# Altium PCB Copy of corePCB3.PcbDoc (part 1 of 3)
Units mil, origin at the board's own origin, x right, y up, seen from the top; angles counter-clockwise.
Board outline 6000 x 4000 mil, 6 copper layers (Top Layer, Layer 3, Layer 1, Layer 2, Layer 4, Bottom Layer), stack 32.111 mil thick; 90 components, 166 nets, 637 pads, 492 vias.
Unrouted connection lines stored in the file: 227.
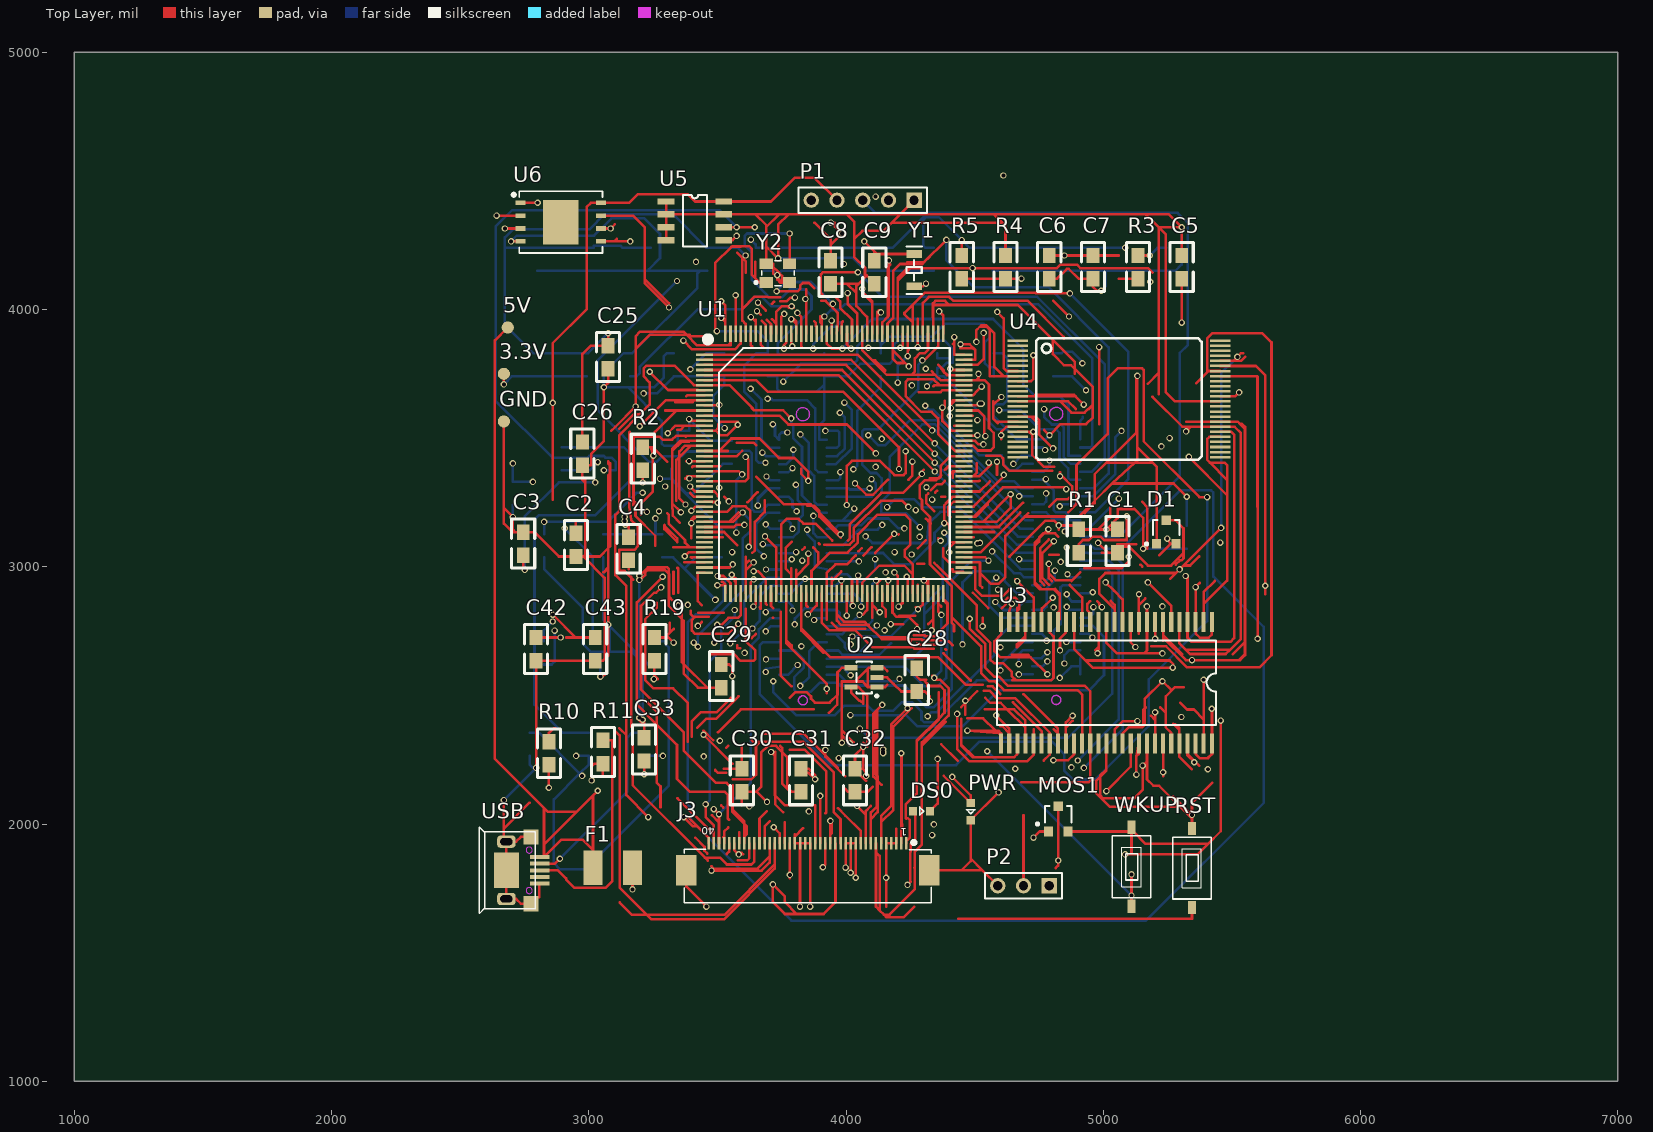
[diagram p0: Top Layer view]
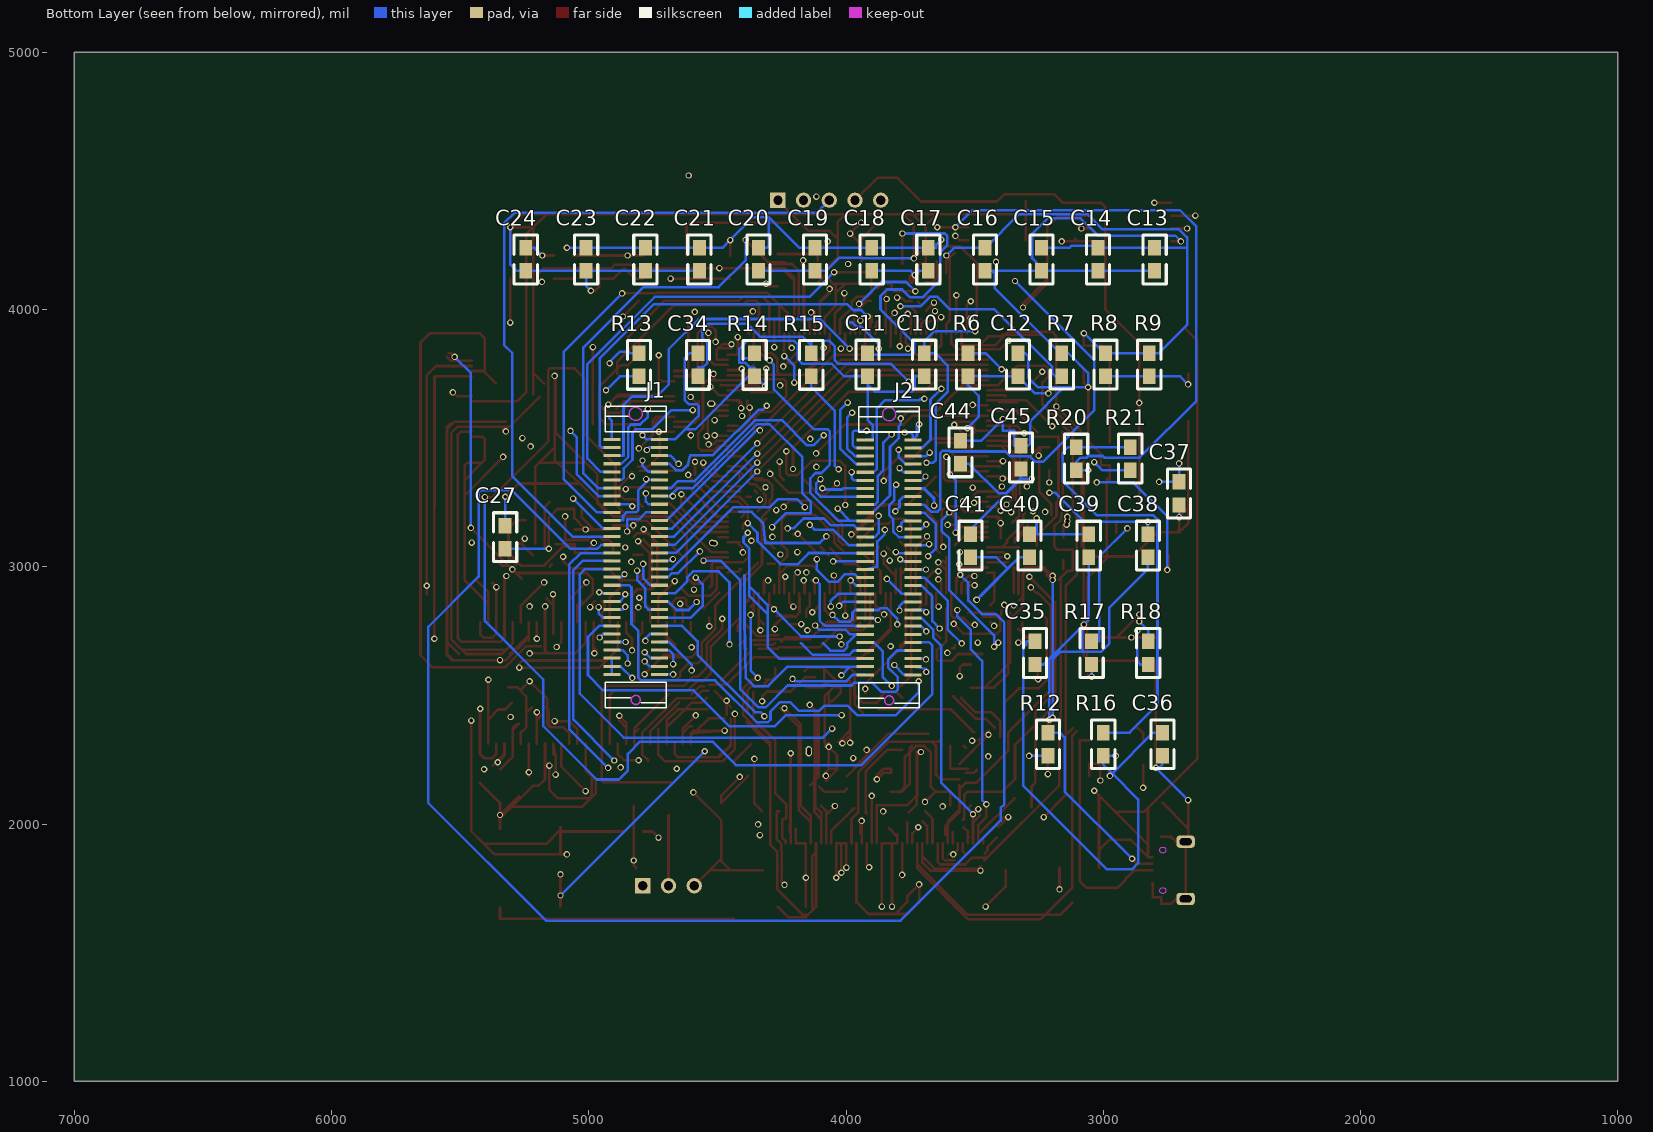
[diagram p1: Bottom Layer view, seen from below]
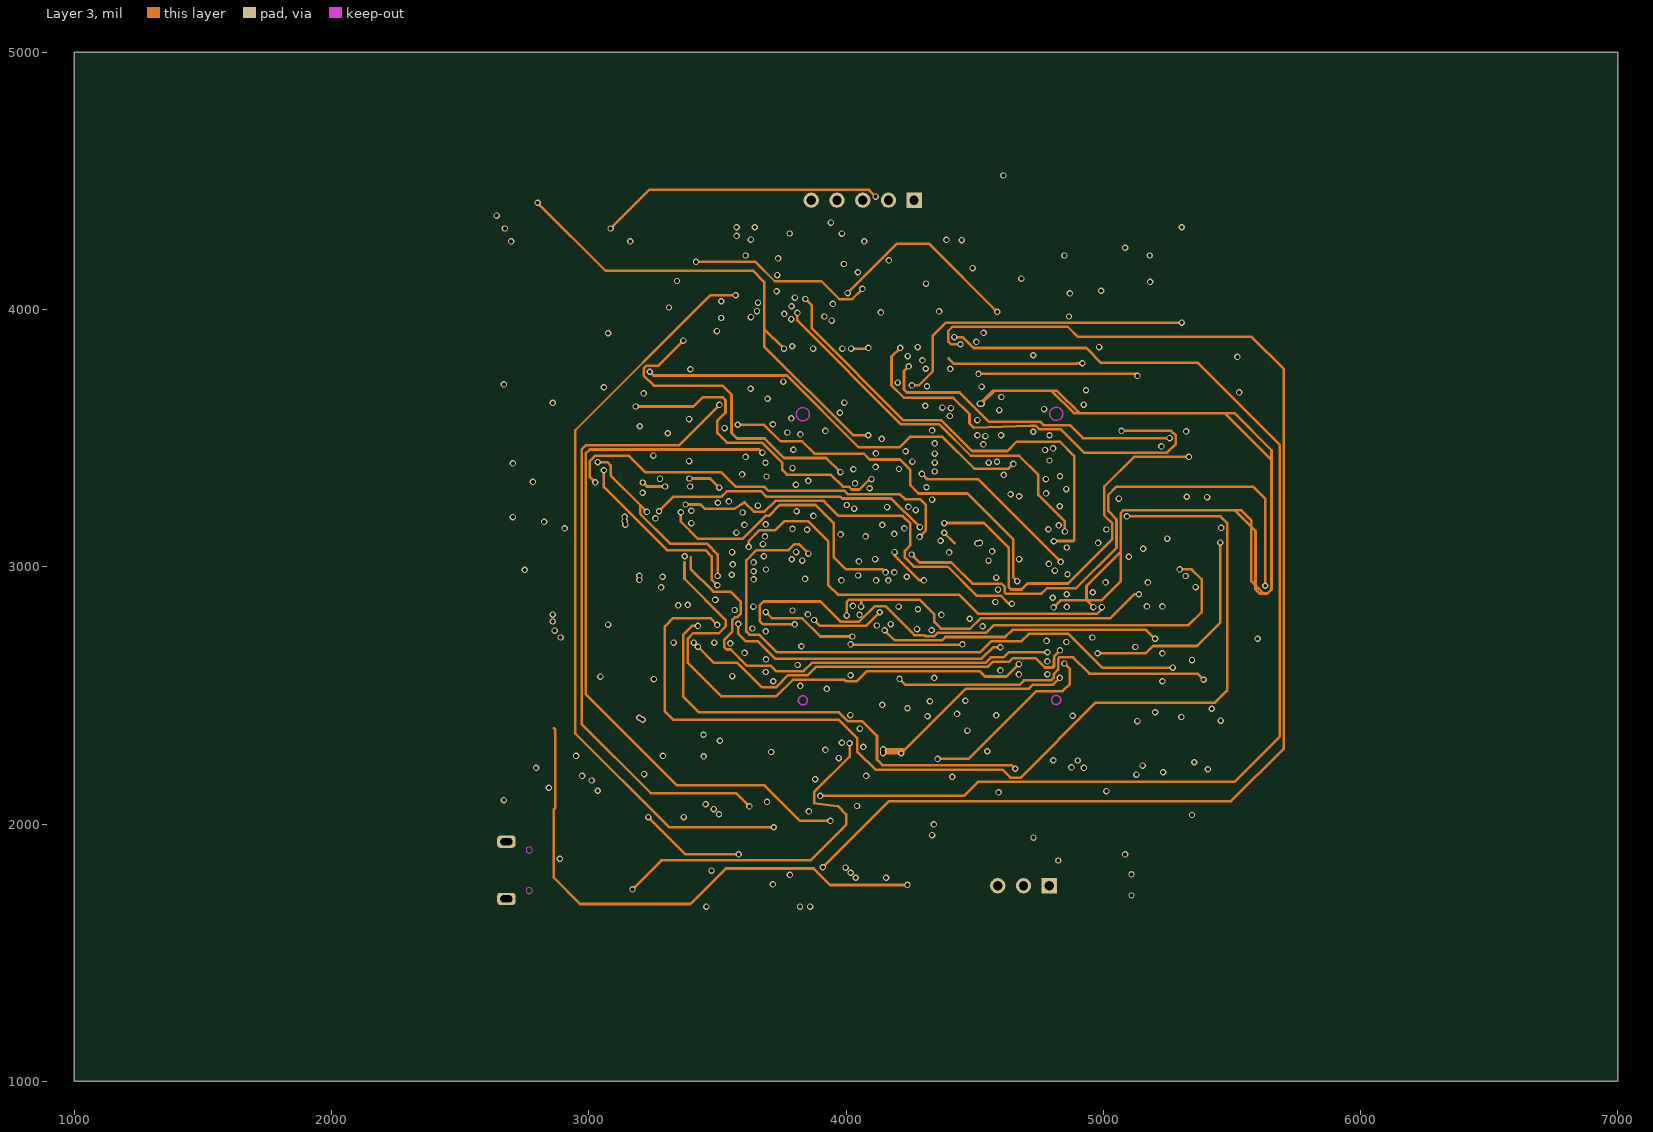
[diagram p2: Layer 3]
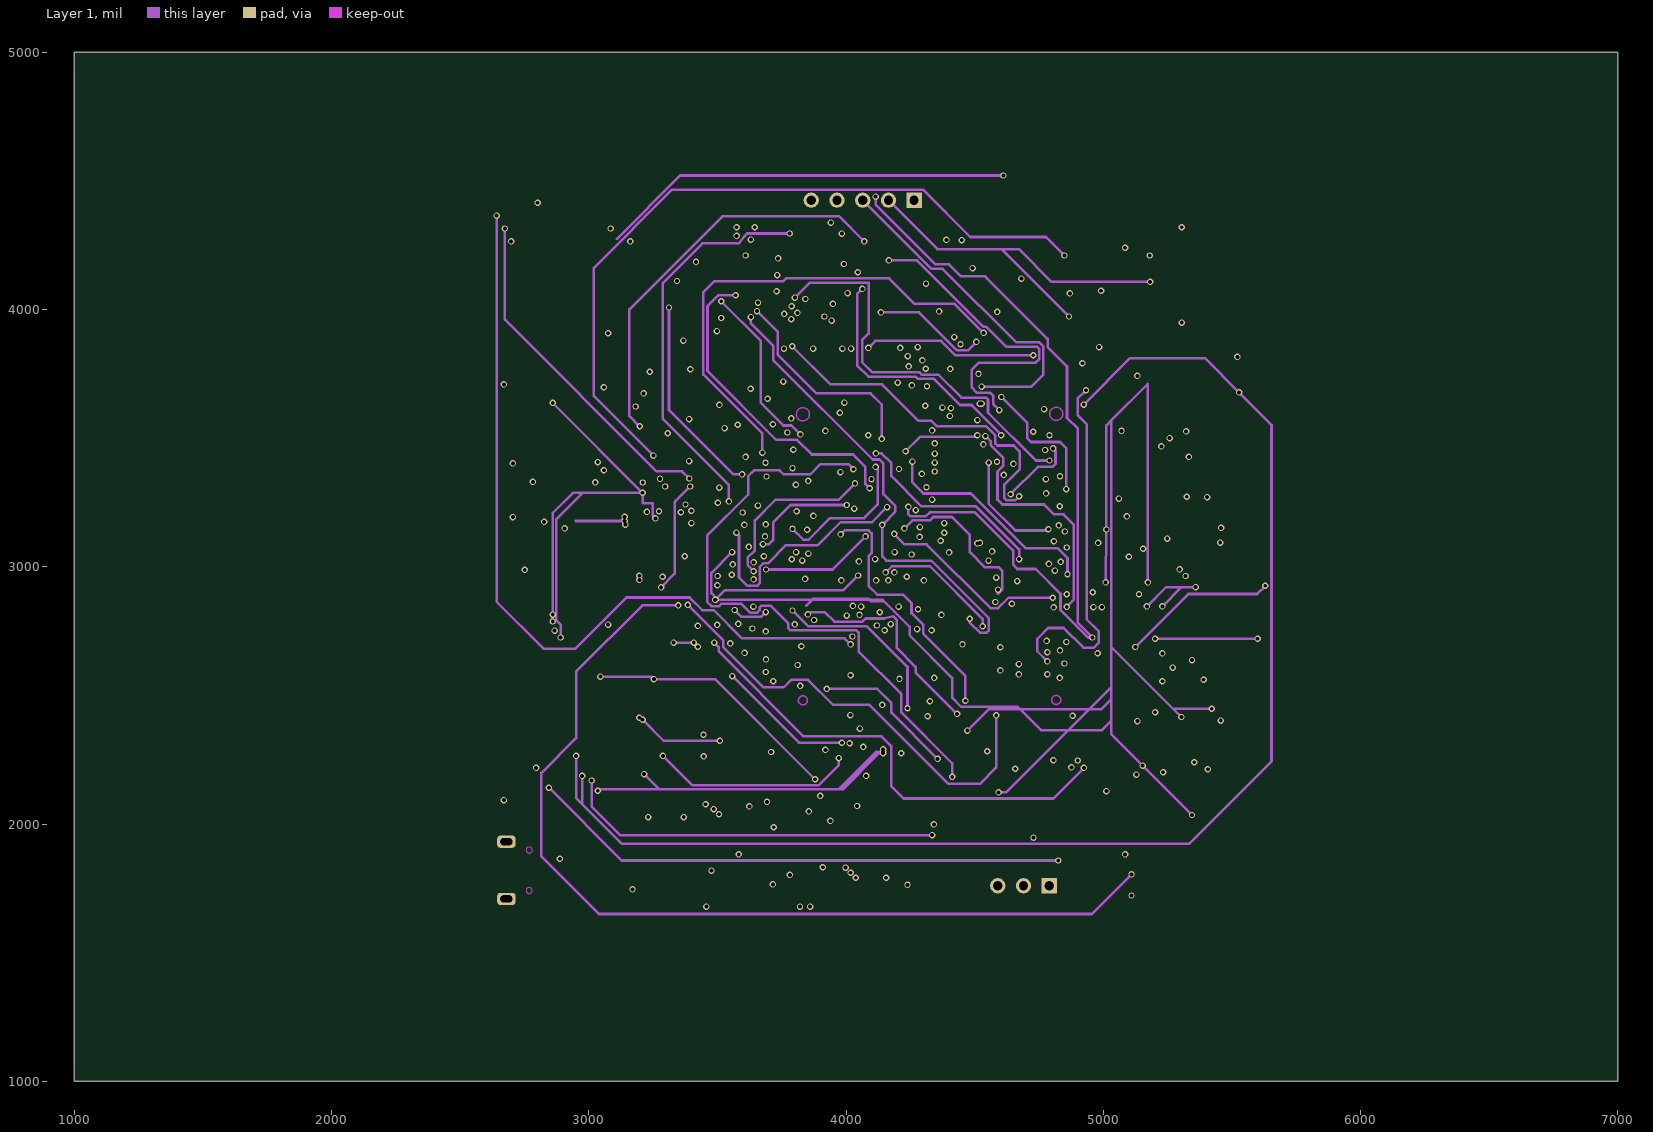
[diagram p3: Layer 1]
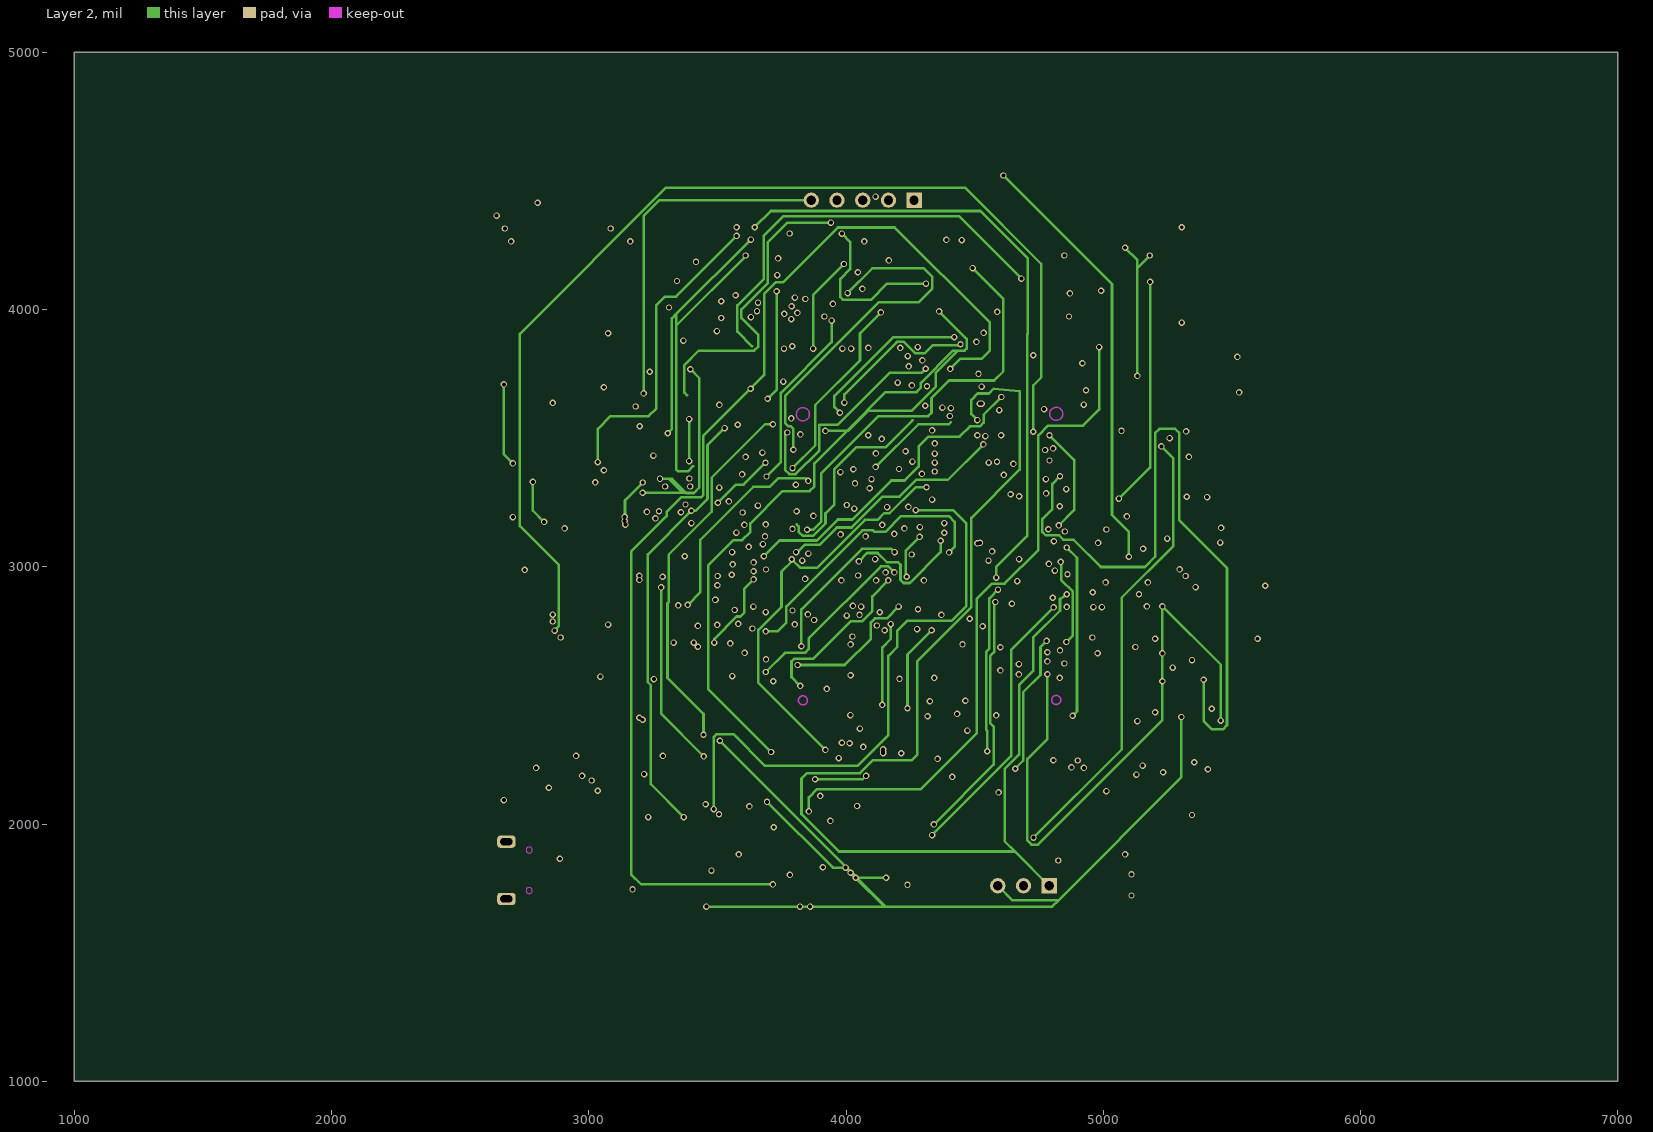
[diagram p4: Layer 2]
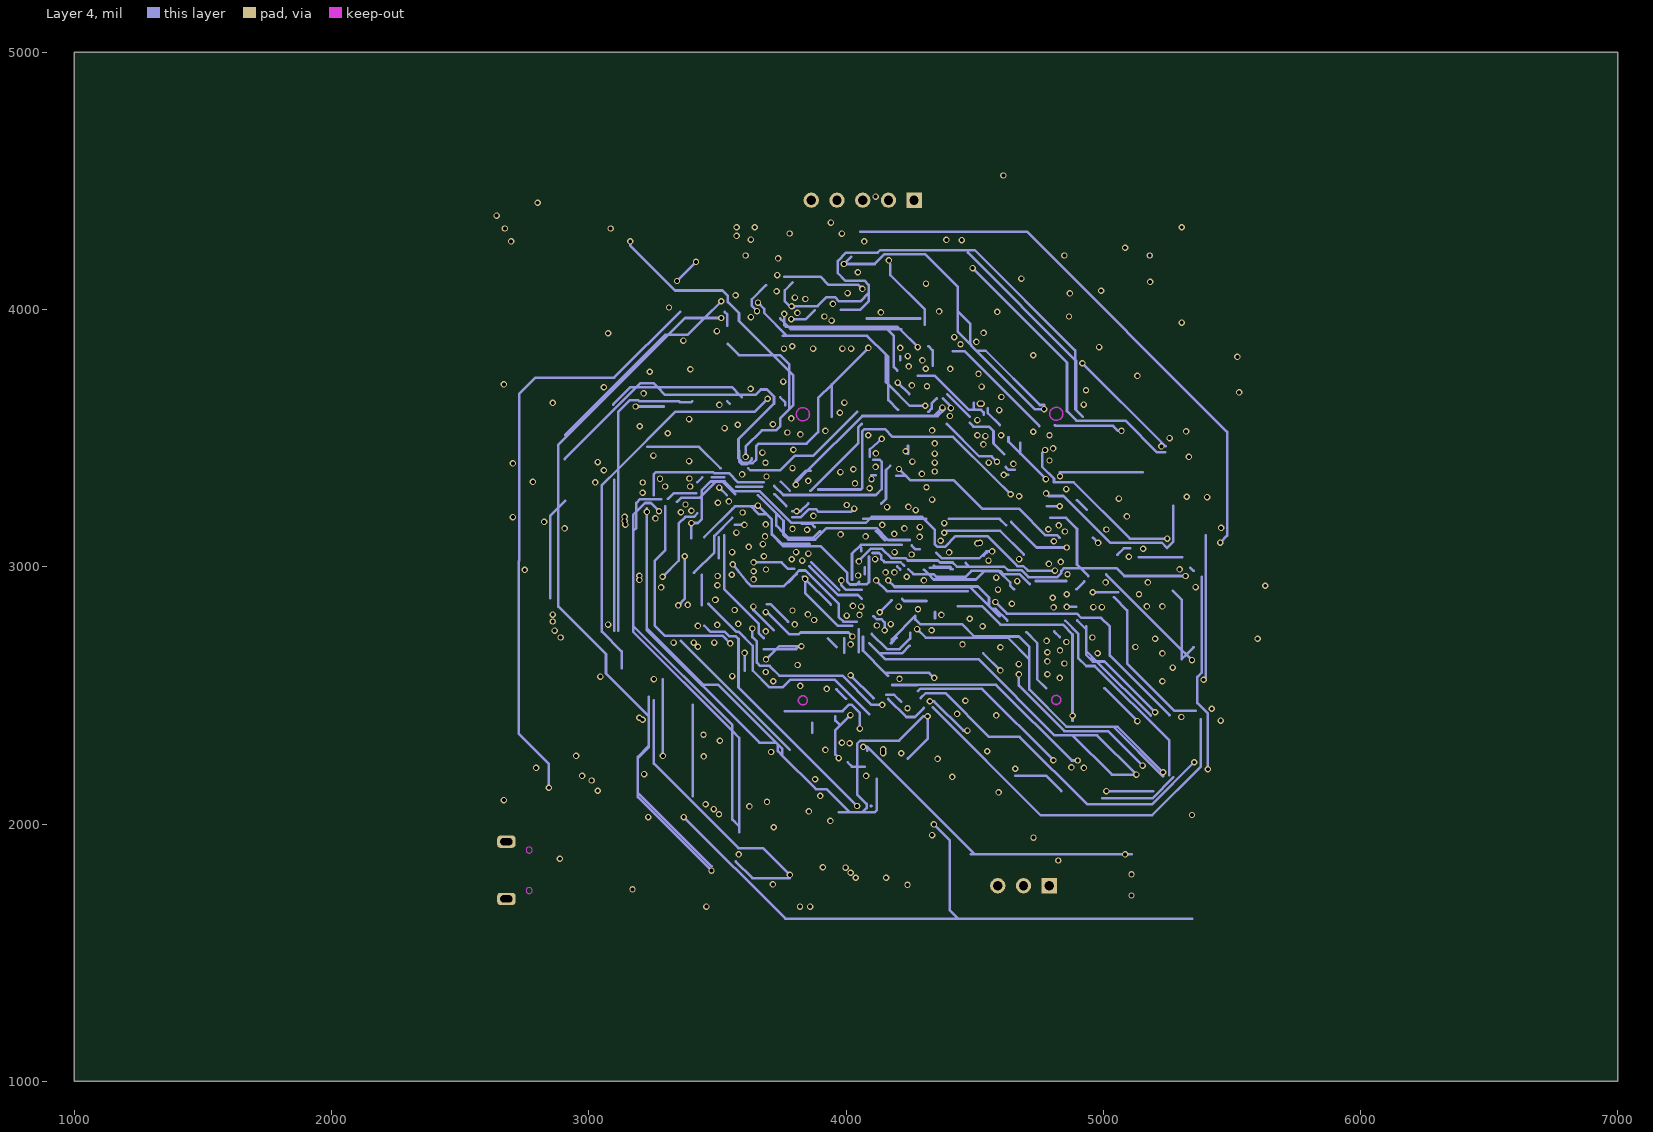
[diagram p5: Layer 4]

## Layer stack, top to bottom
Top Solder: solder mask 0.4, Solder Resist, Dk 3.5
Top Layer: signal copper 1.4
Dielectric 2: prepreg 2.8, PP-006, Dk 4.1
Layer 3: signal copper 1.3779
Dielectric 4: prepreg 2.8, PP-006, Dk 4.1
Layer 1: signal copper 1.3778
Dielectric 1: dielectric 12.6, FR-4, Dk 4.8
Layer 2: signal copper 1.3778
Dielectric 5: prepreg 2.8, PP-006, Dk 4.1
Layer 4: signal copper 1.3779
Dielectric 3: prepreg 2.8, PP-006, Dk 4.1
Bottom Layer: signal copper 1.4
Bottom Solder: solder mask 0.4, Solder Resist, Dk 3.5

## Board outline
1000,1000 7000,1000 7000,5000 1000,5000

## Design rules (kind name [scope] priority, off if disabled: settings)
Clearance [All] p1: gap=6 ignorepadtopadclearanceinfootprint=TRUE except(0: Arc-Hole Track-Hole SMDPad-Hole THPad-Hole Via-Hole Fill-Hole Poly-Hole Region-Hole Text-Hole)
ComponentClearance [All] p1 off: gap=10 collisioncheckmode=3 verticalgap=10 showdistances=FALSE
DiffPairsRouting [All] p1 off: maxlimit=10 minlimit=10 mostfreqgap=10 toplayer_minwidth=15 toplayer_maxwidth=15 toplayer_prefwidth=15 midlayer1_minwidth=15 midlayer1_maxwidth=15 midlayer1_prefwidth=15 midlayer2_minwidth=15 midlayer2_maxwidth=15 midlayer2_prefwidth=15 midlayer3_minwidth=15 midlayer3_maxwidth=15 midlayer3_prefwidth=15 midlayer4_minwidth=15 midlayer4_maxwidth=15 midlayer4_prefwidth=15 bottomlayer_minwidth=15 bottomlayer_maxwidth=15 bottomlayer_prefwidth=15 maxuncoupledlength=500
FanoutControl Fanout_BGA [IsBGA] p1 off: bgadir=Out bgaviamode=Centered fanoutstyle=Auto fanoutdirection=Alternating viagrid=1 // Fanout_BGA (Default Rule)
FanoutControl Fanout_LCC [IsLCC] p2 off: bgadir=Out bgaviamode=Centered fanoutstyle=Auto fanoutdirection=Alternating viagrid=1 // Fanout_LCC (Default Rule)
FanoutControl Fanout_SOIC [IsSOIC] p3 off: bgadir=Out bgaviamode=Centered fanoutstyle=Auto fanoutdirection=Alternating viagrid=1 // Fanout_SOIC (Default Rule)
FanoutControl Fanout_Small [(CompPinCount < 5)] p4 off: bgadir=Out bgaviamode=Centered fanoutstyle=Auto fanoutdirection=OutThenIn viagrid=1 // Fanout_Small (Default Rule)
FanoutControl Fanout_Default [All] p5 off: bgadir=Out bgaviamode=Centered fanoutstyle=Auto fanoutdirection=Alternating viagrid=1 // Fanout_Default (Default Rule)
Height [All] p1 off: minheight=0 maxheight=1000 prefheight=500
PolygonConnect [All] p1: connectstyle=Relief reliefconductorwidth=10 reliefentries=4 polygonreliefangle="90 Angle" airgapwidth=10
RoutingCorners [All] p1 off: cornerstyle=45-Degree minsetback=100 maxsetback=100
RoutingLayers [All] p1 off: top layer_v5=TRUE mid layer 1_v5=TRUE mid layer 2_v5=TRUE mid layer 3_v5=TRUE mid layer 4_v5=TRUE bottom layer_v5=TRUE
RoutingPriority [All] p1 off: routingpriority=0
RoutingTopology [All] p1 off: topology=Shortest
RoutingVias [All] p1: holewidth=15 width=25 viastyle="Through Hole" minholewidth=15 minwidth=25 maxholewidth=15 maxwidth=25
SMDToCorner [All] p1: distance=0
SolderMaskExpansion [All] p1: expansion=4
Width [All] p1 off: maxlimit=10 minlimit=10 preferedwidth=10
18 further rules are at their usual default settings.

## Classes and differential pairs
component class stm: C1 C2 C3 C4 C5 C6 C7 C8 C9 C10 C11 C12 C13 C14 C15 C16 C17 C18 C19 C20 C21 C22 C23 C24 C25 C26 C27 D1 J1 J2 P1 R1 R2 R3 R4 R5 R6 R7 R8 R9 RST U1 Y1 Y2
component class mem: C35 C36 C37 C38 C39 C40 C41 C42 C43 C44 C45 R16 R17 R18 R19 R20 R21 U3 U4 U5 U6
component class circuit: 3.3V 5V C28 C29 C30 C31 C32 C33 C34 DS0 F1 GND J3 MOS1 P2 PWR R10 R11 R12 R13 R14 R15 U2 USB WKUP

## Components (designator, comment, footprint, x,y, rotation, side; value= is the part's Value field where it differs from the comment)
3.3V "TEST POINT" TP-1.5 2670,3750 r90 top
5V "TEST POINT" TP-1.5 2685,3930 r0 top
C1 "104" 0805 5055,3055 r90 top
C2 "104" 0805 2950,3040 r90 top
C3 "225" 0805 2745,3045 r90 top
C4 "225" 0805 3155,3025 r90 top
C5 "225" 0805 5305,4120 r90 top
C6 "10uF" 0805 4790,4120 r90 top
C7 "104" 0805 4960,4120 r90 top
C8 "6pF" 0805 3940,4100 r90 top
C9 "6pF" 0805 4110,4100 r90 top
C10 "22pF" 0805 3696.13,3740.59 r90 bottom
C11 "22pF" 0805 3916.13,3740.59 r90 bottom
C12 "104" 0805 3331.13,3740.59 r90 bottom
C13 "104" 0805 2800.13,4150 r90 bottom
C14 "104" 0805 3020.13,4150 r90 bottom
C15 "104" 0805 3240.13,4150 r90 bottom
C16 "104" 0805 3460.13,4150 r90 bottom
C17 "104" 0805 3680.13,4150 r90 bottom
C18 "104" 0805 3900.13,4150 r90 bottom
C19 "104" 0805 4120.13,4150 r90 bottom
C20 "104" 0805 4340.13,4150 r90 bottom
C21 "104" 0805 4570.13,4150 r90 bottom
C22 "104" 0805 4780.13,4150 r90 bottom
C23 "104" 0805 5010.13,4150 r90 bottom
C24 "104" 0805 5245.13,4150 r90 bottom
C25 "104" 0805 3074.94,3770 r90 top
C26 "104" 0805 2975,3395 r90 top
C27 "104" 0805 5325,3070 r90 bottom
C28 "104" 0805 4274.94,2515 r90 top
C29 "10uF" 0805 3514.94,2530 r90 top
C30 "103" 0805 3595,2125 r90 top
C31 "104" 0805 3825,2125 r90 top
C32 "10uF" 0805 4035,2125 r90 top
C33 "104" 0805 3214.94,2245 r90 top
C34 "104" 0805 4575.13,3740 r90 bottom
C35 "104" 0805 3265.13,2620 r90 bottom
C36 "104" 0805 2770.13,2265 r90 bottom
C37 "104" 0805 2705.06,3240 r90 bottom
C38 "104" 0805 2826.45,3036.93 r90 bottom
C39 "104" 0805 3056.45,3036.93 r90 bottom
C40 "104" 0805 3286.45,3036.93 r90 bottom
C41 "104" 0805 3516.45,3036.93 r90 bottom
C42 "104" 0805 2795,2635 r90 top
C43 "104" 0805 3025,2635 r90 top
C44 "104" 0805 3555.13,3400 r90 bottom
C45 "104" 0805 3320.13,3380 r90 bottom
D1 "BAT54C" SOT-23 5245,3130 r0 top
DS0 "LED" SMDLED-0603 4260,2050 r0 top
F1 "1812L075PR" *1812 3093.23,1830 r0 top
GND "TEST POINT" TP-1.5 2670,3565 r90 top
J1 "3710M060046G3FT01" 3710F060046G3FT01 4910,2581.61 r0 bottom
J2 "3710M060046G3FT01" 3710F060046G3FT01 3925.04,2580.04 r0 bottom
J3 "RGBLCD" FPC-TOP40 4234.65,1929 r180 top
MOS1 "SI2301" SO-G3/C2.5 4825,2020 r0 top
P1 "SWD" HDR1X5 4265,4425 r180 top
P2 "USART1" HDR1X3 4790,1760 r180 top
PWR "LED" SMDLED-0603 4485,2081.93 r270 top
R1 "10K" 0805 4905,3055 r90 top
R2 "10R" 0805 3209.94,3375 r90 top
R3 "10R" 0805 5135,4120 r90 top
R4 "0R" 0805 4620,4120 r90 top
R5 "0R" 0805 4450,4120 r90 top
R6 "10K" 0805 3526.13,3740.59 r90 bottom
R7 "100K" 0805 3161.13,3740.59 r90 bottom
R8 "0R" 0805 2991.13,3740.59 r90 bottom
R9 "0R" 0805 2821.13,3740.59 r90 bottom
R10 "1K" 0805 2844.94,2230 r90 top
R11 "10R" 0805 3055,2235 r90 top
R12 "10R" 0805 3215.06,2265 r90 bottom
R13 "10R" 0805 4805.13,3740 r90 bottom
R14 "100K" 0805 4355.13,3740 r90 bottom
R15 "1K" 0805 4135.13,3740 r90 bottom
R16 "0R" 0805 3000.13,2265 r90 bottom
R17 "10K" 0805 3045.13,2620 r90 bottom
R18 "10K" 0805 2825.13,2620 r90 bottom
R19 "10K" 0805 3255,2635 r90 top
R20 "4.7K" 0805 3105.13,3375 r90 bottom
R21 "4.7K" 0805 2895.13,3375 r90 bottom
RST "KEY_M" KEY_SOP3625 5345,1675 r90 top
U1 "STM32F767IGT6" LQFP176 3450,3824.02 r0 top
U2 "CAT6219-330TD" SOT-23-5 4120,2532.6 r180 top
U3 "W9825G6KH" TSOP54 5421.97,2785 r270 top
U4 "MT29F4G08" TSOP48 4667.6,3879.01 r0 top
U5 "24C02" SOP-8 3300.59,4420 r0 top
U6 "W25Q256" WSON8 2891.5,4340 r0 top
USB "USB-AB" "USB_AB - 5S - B" 2595,1820 r90 top
WKUP "KEY_UP" KEY_SOP3625 5110,1680 r90 top
Y1 "32.768KHz" XTAL3215 4265,4090 r90 top
Y2 "25Mhz" XTAL3225 3690,4105 r0 top

## Footprints (in the part's own frame and the unit in brackets; to place one, negate y for a bottom-side part, rotate by r counter-clockwise, add the part's x,y. Pads: shape width x height; smd on the part's side, far side on the other; paste and mask are expansions set on the pad)
0805 [mil]
  rect 60x50 smd: 1(0,-0.06) 2(90,-0.06)
  silkscreen extent -50,-45 140,45
3710F060046G3FT01 [mm]
  rect 1.7x0.3 smd: 1(-4.7,0) 2(-4.7,-0.8) 3(-4.7,-1.6) 4(-4.7,-2.4) 5(-4.7,-3.2) 6(-4.7,-4) 7(-4.7,-4.8) 8(-4.7,-5.6) 9(-4.7,-6.4) 10(-4.7,-7.2) 11(-4.7,-8) 12(-4.7,-8.8) 13(-4.7,-9.6) 14(-4.7,-10.4) 15(-4.7,-11.2) 16(-4.7,-12) 17(-4.7,-12.8) 18(-4.7,-13.6) 19(-4.7,-14.4) 20(-4.7,-15.2) 21(-4.7,-16) 22(-4.7,-16.8) 23(-4.7,-17.6) 24(-4.7,-18.4) 25(-4.7,-19.2) 26(-4.7,-20) 27(-4.7,-20.8) 28(-4.7,-21.6) 29(-4.7,-22.4) 30(-4.7,-23.2) 31(0,-23.2) 32(0,-22.4) 33(0,-21.6) 34(0,-20.8) 35(0,-20) 36(0,-19.2) 37(0,-18.4) 38(0,-17.6) 39(0,-16.8) 40(0,-16) 41(0,-15.2) 42(0,-14.4) 43(0,-13.6) 44(0,-12.8) 45(0,-12) 46(0,-11.2) 47(0,-10.4) 48(0,-9.6) 49(0,-8.8) 50(0,-8) 51(0,-7.2) 52(0,-6.4) 53(0,-5.6) 54(0,-4.8) 55(0,-4) 56(0,-3.2) 57(0,-2.4) 58(0,-1.6) 59(0,-0.8) 60(0,0)
  Keep-Out Layer circle w0.152: c-2.35,-25.725 r0.65
  Keep-Out Layer circle w0.152: c-2.35,2.525 r0.45
  silkscreen extent -5.35,-26.48 0.65,3.27
*1812 [mm]
  rect 1.9x3.4 smd: 1(-1.95,0) 2(1.95,0)
FPC-TOP40 [mm]
  rect 0.25x1.2 smd: 1(0,0.102) 2(0.5,0.102) 3(1,0.102) 4(1.5,0.102) 5(2,0.102) 6(2.5,0.102) 7(3,0.102) 8(3.5,0.102) 9(4,0.102) 10(4.5,0.102) 11(5,0.102) 12(5.5,0.102) 13(6,0.102) 14(6.5,0.102) 15(7,0.102) 16(7.5,0.102) 17(8,0.102) 18(8.5,0.102) 19(9,0.102) 20(9.5,0.102) 21(10,0.102) 22(10.5,0.102) 23(11,0.102) 24(11.5,0.102) 25(12,0.102) 26(12.5,0.102) 27(13,0.102) 28(13.5,0.102) 29(14,0.102) 30(14.5,0.102) 31(15,0.102) 32(15.5,0.102) 33(16,0.102) 34(16.5,0.102) 35(17,0.102) 36(17.5,0.102) 37(18,0.102) 38(18.5,0.102) 39(19,0.102) 40(19.5,0.102)
  rect 2x3 smd: A(-2.25,2.754) B(21.725,2.754)
  silkscreen extent -2.45,-0.15 21.92,5.97
HDR1X3 [mm]
  rect 1.5x1.5 hole 0.9: 1(0,0)
  round 1.5 hole 0.9: 2(2.54,0) 3(5.08,0)
  silkscreen extent -1.27,-1.27 6.35,1.27
HDR1X5 [mm]
  rect 1.5x1.5 hole 0.9: 1(0,0)
  round 1.5 hole 0.9: 2(2.54,0) 3(5.08,0) 4(7.62,0) 5(10.16,0)
  silkscreen extent -1.27,-1.27 11.43,1.27
KEY_SOP3625 [mm]
  rect 1.3x0.8 smd: 1(0,0) 2(7.8,0)
  silkscreen extent 0.85,-1.9 6.95,1.9
LQFP176 [mm]
  rect 1.65x0.254 smd: 1(0,0) 2(0,-0.5) 3(0,-1) 4(0,-1.5) 5(0,-2) 6(0,-2.5) 7(0,-3) 8(0,-3.5) 9(0,-4) 10(0,-4.5) 11(0,-5) 12(0,-5.5) 13(0,-6) 14(0,-6.5) 15(0,-7) 16(0,-7.5) 17(0,-8) 18(0,-8.5) 19(0,-9) 20(0,-9.5) 21(0,-10) 22(0,-10.5) 23(0,-11) 24(0,-11.5) 25(0,-12) 26(0,-12.5) 27(0,-13) 28(0,-13.5) 29(0,-14) 30(0,-14.5) 31(0,-15) 32(0,-15.5) 33(0,-16) 34(0,-16.5) 35(0,-17) 36(0,-17.5) 37(0,-18) 38(0,-18.5) 39(0,-19) 40(0,-19.5) 41(0,-20) 42(0,-20.5) 43(0,-21) 44(0,-21.5) 89(25.631,-21.5) 90(25.631,-21) 91(25.631,-20.5) 92(25.631,-20) 93(25.631,-19.5) 94(25.631,-19) 95(25.631,-18.5) 96(25.631,-18) 97(25.631,-17.5) 98(25.631,-17) 99(25.631,-16.5) 100(25.631,-16) 101(25.631,-15.5) 102(25.631,-15) 103(25.631,-14.5) 104(25.631,-14) 105(25.631,-13.5) 106(25.631,-13) 107(25.631,-12.5) 108(25.631,-12) 109(25.631,-11.5) 110(25.631,-11) 111(25.631,-10.5) 112(25.631,-10) 113(25.631,-9.5) 114(25.631,-9) 115(25.631,-8.5) 116(25.631,-8) 117(25.631,-7.5) 118(25.631,-7) 119(25.631,-6.5) 120(25.631,-6) 121(25.631,-5.5) 122(25.631,-5) 123(25.631,-4.5) 124(25.631,-4) 125(25.631,-3.5) 126(25.631,-3) 127(25.631,-2.5) 128(25.631,-2) 129(25.631,-1.5) 130(25.631,-1) 131(25.631,-0.5) 132(25.631,0)
  rect 0.254x1.65 smd: 45(2.065,-23.566) 46(2.566,-23.566) 47(3.066,-23.566) 48(3.565,-23.566) 49(4.066,-23.566) 50(4.565,-23.566) 51(5.066,-23.566) 52(5.565,-23.566) 53(6.066,-23.566) 54(6.565,-23.566) 55(7.066,-23.566) 56(7.565,-23.566) 57(8.066,-23.566) 58(8.565,-23.566) 59(9.066,-23.566) 60(9.565,-23.566) 61(10.066,-23.566) 62(10.565,-23.566) 63(11.066,-23.566) 64(11.565,-23.566) 65(12.066,-23.566) 66(12.565,-23.566) 67(13.066,-23.566) 68(13.565,-23.566) 69(14.066,-23.566) 70(14.565,-23.566) 71(15.066,-23.566) 72(15.566,-23.566) 73(16.066,-23.566) 74(16.566,-23.566) 75(17.065,-23.566) 76(17.566,-23.566) 77(18.065,-23.566) 78(18.566,-23.566) 79(19.065,-23.566) 80(19.566,-23.566) 81(20.065,-23.566) 82(20.566,-23.566) 83(21.065,-23.566) 84(21.566,-23.566) 85(22.065,-23.566) 86(22.566,-23.566) 87(23.065,-23.566) 88(23.566,-23.566) 133(23.566,2.065) 134(23.065,2.065) 135(22.566,2.065) 136(22.065,2.065) 137(21.566,2.065) 138(21.065,2.065) 139(20.566,2.065) 140(20.065,2.065) 141(19.566,2.065) 142(19.065,2.065) 143(18.566,2.065) 144(18.065,2.065) 145(17.566,2.065) 146(17.065,2.065) 147(16.566,2.065) 148(16.066,2.065) 149(15.566,2.065) 150(15.066,2.065) 151(14.565,2.065) 152(14.066,2.065) 153(13.565,2.065) 154(13.066,2.065) 155(12.565,2.065) 156(12.066,2.065) 157(11.565,2.065) 158(11.066,2.065) 159(10.565,2.065) 160(10.066,2.065) 161(9.565,2.065) 162(9.066,2.065) 163(8.565,2.065) 164(8.066,2.065) 165(7.565,2.065) 166(7.066,2.065) 167(6.565,2.065) 168(6.066,2.065) 169(5.565,2.065) 170(5.066,2.065) 171(4.565,2.065) 172(4.066,2.065) 173(3.565,2.065) 174(3.066,2.065) 175(2.566,2.065) 176(2.065,2.065)
  silkscreen extent 0.04,-22.15 24.22,1.82
SMDLED-0603 [mil]
  rect 32x32 smd: 1(0,0) 2(66.93,0)
  silkscreen extent 26,-17 42,17
SO-G3/C2.5 [mm]
  rect 0.9x0.95 smd: 1(-0.95,-1.25) 2(0.95,-1.25) 3(0,1.25)
  silkscreen extent -2.15,-0.63 1.3,1.25
SOP-8 [mil]
  rect 65x25 smd: 1(0,0) 2(0,-50) 3(0,-100) 4(0,-150) 5(224.41,-150) 6(224.41,-100) 7(224.41,-50) 8(224.41,0)
  silkscreen extent 65,-175 159,25
SOT-23 [mm]
  rect 0.9x0.95 smd: 1(-0.95,-1.048) 2(0.95,-1.048) 3(0,1.302)
  silkscreen extent -2.07,-1.17 1.3,1.3
SOT-23-5 [mil]
  rect 50x20 smd: 1(0,0) 2(0,-37.4) 3(0,-74.8) 4(100,-74.8) 5(100,0)
  silkscreen extent 0,-99 80,35
TP-1.5 [mm]
  round 1.2 smd: 1(0,0)
TSOP48 [mm]
  rect 2x0.25 smd: 1(0,0) 2(0,-0.5) 3(0,-1) 4(0,-1.5) 5(0,-2) 6(0,-2.5) 7(0,-3) 8(0,-3.5) 9(0,-4) 10(0,-4.5) 11(0,-5) 12(0,-5.5) 13(0,-6) 14(0,-6.5) 15(0,-7) 16(0,-7.5) 17(0,-8) 18(0,-8.5) 19(0,-9) 20(0,-9.5) 21(0,-10) 22(0,-10.5) 23(0,-11) 24(0,-11.5) 25(20,-11.5) 26(20,-11) 27(20,-10.5) 28(20,-10) 29(20,-9.5) 30(20,-9) 31(20,-8.5) 32(20,-8) 33(20,-7.5) 34(20,-7) 35(20,-6.5) 36(20,-6) 37(20,-5.5) 38(20,-5) 39(20,-4.5) 40(20,-4) 41(20,-3.5) 42(20,-3) 43(20,-2.5) 44(20,-2) 45(20,-1.5) 46(20,-1) 47(20,-0.5) 48(20,0)
  silkscreen extent 1.83,-11.75 18.17,0.25
TSOP54 [mm]
  rect 2x0.4 smd: 1(0,0) 2(0,-0.8) 3(0,-1.6) 4(0,-2.4) 5(0,-3.2) 6(0,-4) 7(0,-4.8) 8(0,-5.6) 9(0,-6.4) 10(0,-7.2) 11(0,-8) 12(0,-8.8) 13(0,-9.6) 14(0,-10.4) 15(0,-11.2) 16(0,-12) 17(0,-12.8) 18(0,-13.6) 19(0,-14.4) 20(0,-15.2) 21(0,-16) 22(0,-16.8) 23(0,-17.6) 24(0,-18.4) 25(0,-19.2) 26(0,-20) 27(0,-20.8) 28(12,-20.8) 29(12,-20) 30(12,-19.2) 31(12,-18.4) 32(12,-17.6) 33(12,-16.8) 34(12,-16) 35(12,-15.2) 36(12,-14.4) 37(12,-13.6) 38(12,-12.8) 39(12,-12) 40(12,-11.2) 41(12,-10.4) 42(12,-9.6) 43(12,-8.8) 44(12,-8) 45(12,-7.2) 46(12,-6.4) 47(12,-5.6) 48(12,-4.8) 49(12,-4) 50(12,-3.2) 51(12,-2.4) 52(12,-1.6) 53(12,-0.8) 54(12,0)
  silkscreen extent 1.83,-21.2 10.16,0.4
"USB_AB - 5S - B" [mm]
  rect 0.4x1.9 smd: 1(1.3,-5.436) 2(0.65,-5.436) 3(0,-5.436) 4(-0.65,-5.436) 5(-1.3,-5.436)
  rrect50% 1.2x1.8 hole 0.7 slot 1.2 at 90 deg: 6(2.825,-2.15) 7(-2.825,-2.15)
  rect 1.5x1.5 smd: 8(-3.302,-4.572) 9(3.302,-4.572)
  rect 3.5x2.5 smd: 9(0,-2.159)
  Keep-Out Layer circle w0.102: c2,-4.4 r0.3
  Keep-Out Layer circle w0.102: c-2,-4.4 r0.3
  silkscreen extent -4.26,-5 4.26,0.51
WSON8 [mm]
  rect 1x0.45 smd: 1(-3.975,1.905) 2(-3.975,0.635) 3(-3.975,-0.635) 4(-3.975,-1.905) 5(3.975,-1.905) 6(3.975,-0.635) 7(3.975,0.635) 8(3.975,1.905)
  rect 3.5x4.4 smd: 9(0,0)
  silkscreen extent -4.8,-3.05 4.1,3.05
XTAL3215 [mm]
  rect 0.75x1.5 smd: 1(0,0) 2(3.2,0)
  silkscreen extent -0.74,-0.75 3.94,0.75
XTAL3225 [mm]
  rect 1.3x1.05 smd: 1(0,0) 2(2.3,0) 3(2.3,1.85) 4(0,1.85)
  silkscreen extent -1.14,-0.33 2.74,2.17

## Part data
3.3V 5V GND: library part TEST-POINT, "测试点"
C1 C2 C3 C4 C5 C6 C7 C8 C9 C10 C11 C12 C13 C14 C15 C16 C17 C18 C19 C20 C21 C22 C23 C24 C25 C26 C27 C28 C29 C30 C31 C32 C33 C34 C35 C36 C37 C38 C39 C40 C41 C42 C43 C44 C45: library part C
D1: "双肖特基二极管"
F1: "PTC Resettable Fuse 0.75A_hold_ 1.5A_trip_ 13.2VDC 100A 0.8W 0.2s 0.1Ohm SMD Solder Pad 1812 T/R", Package="1812 Littelfuse", Availability=Unavailable, MF="Littelfuse Inc.", MP=1812L075PR, Price=None, SnapEDA_Link=https://www.snapeda.com/parts/1812L075PR/Littelfuse%20Inc./view-part/?ref=snap
J1 J2: library part 3710F, "3710F060046G3FT01"
J3: library part FPC-40, "FPC-40P-0.5mm"
MOS1: library part MOS-P, "IRLML6401/SI2301"
P1: library part "Header 5", "Header, 5-Pin", LatestRevisionDate=17-Jul-2002, LatestRevisionNote="Re-released for DXP Platform.", Publisher="Altium Limited"
P2: library part "Header 3", "Header, 3-Pin", LatestRevisionDate=17-Jul-2002, LatestRevisionNote="Re-released for DXP Platform.", Publisher="Altium Limited"
R1 R2 R3 R4 R5 R6 R7 R8 R9 R10 R11 R12 R13 R14 R15 R16 R17 R18 R19 R20 R21: library part R
U2: "3.3V 500mA LDO"
U3: library part IS42S16160B, "32MB SDRAM"
U4: library part K9F2G08U0C, "256MB NAND FLASH"
U5: library part 24C256, "EEPROM"
U6: library part W25Q128, "W25Q128"
USB: "MicroUSB"
WKUP: library part KEY_M
Y1: library part XTAL, "普通晶振"
Y2: library part XTAL_3225, "3225贴片无源晶振"

## Via types
v1: diameter 25, hole 15, Top Layer to Bottom Layer, 492 vias

## Nets (pads, with @x,y where several pads share a name; then routed paths per layer and width w, separated by ;. In a path a pad name is that pad's centre, name@x,y a point inside that pad or via, vN(x,y) a via of type N, cw(c..) or ccw(c..) an arc to the next point about the centre after c; other vN are vias at no path point)
1WIRE_DQ: J2.4 U1.92 | length 1640.3
  Top Layer w10: U1.92@4459.09,3036.61 4541.39,3036.61 v1(4554,3024)
  Bottom Layer w10: J2.4@3740,2674.53 3801.47,2674.53 3836,2640 3836,2608 3798.5,2570.5 3798.5,2523 3808,2513.5 3862.5,2513.5 3897.5,2548.5 3968.43,2548.5 3978.43,2538.5 4227,2538.5 4312,2453.5 4340.5,2453.5 4410.5,2523.5 4410.5,2946.5 4488,3024 v1(4554,3024)
BOOT0: J1.31 R7.1 U1.166 | length 4082.4
  Top Layer w10: 3711.5,3962.5 3728.17,3945.83 ; 3711.5,4022 3720,4030.5 ; U1.166@3728.17,3905.33 3728.17,3945.83 ; v1@3778.04,4006.96 v1@3797,4006.96 ; v1(3788.52,4013) 3750.43,4013 3728.17,3990.74 3728.17,3945.83
  Layer 4 w10: v1(3788.52,4013) 3889.59,4013 3924.59,4048 3956.5,4048 3972.5,4032 4056,4032 4088,4064 ; 3792,4105 3762,4075 3762,4032 3787.04,4006.96 v1@3797,4006.96 ; 3979,3999 4055,3999 4088,4032 4088,4064 ; 4474,4221 4890.78,3804.22 ; 4920,3584 4894.83,3609.17 ; 4088,4064 4088,4096 4072,4112 3997,4112 3968,4141 3968,4189 4000,4221 4123,4221 4132.5,4230.5 4500.95,4230.5 4890.78,3840.67 4890.78,3804.22 ; 4890.78,3804.22 4894.83,3800.17 4894.83,3609.17 ; 4890.78,3804.22 4890.78,3613.22 4894.83,3609.17
  Bottom Layer w10: R7.1@3161.07,3740.59 3186.59,3740.59 3198,3752 3198,3776 3423,4001 3596.5,4001 3646,4050.5 3671.5,4050.5 3709,4013 v1(3788.52,4013) ; J1.31@4910,3495 4910,3567 4920,3577 4920,3584
DCMI_D0: J2.16 U1.115 | length 1063.5
  Top Layer w10: U1.115@4459.09,3489.37 4501,3489.37 ; 4511,3480 4501.63,3489.37 4501,3489.37 ; v1(4534,3476) 4514.37,3476 4501,3489.37
  Layer 2 w10: v1(3806,3057) 3812,3057 3841.2,3086.2 3898.2,3086.2 3964.58,3152.58 4021.58,3152.58 4142,3273 4208,3273 4272.5,3337.5 4395.5,3337.5 v1(4534,3476)
  Bottom Layer w10: J2.16@3740,3052.48 3766,3052.48 3802,3053 v1(3806,3057)
DCMI_D1: J2.17 U1.116 | length 1383.6
  Top Layer w10: v1(4003,3240) 4003,3392 4023,3412 4132,3412 4188,3356 4224,3356 4232,3364 v1(4232,3449) ; U1.116@4459.09,3509.06 4509.06,3509.06 v1(4511,3511)
  Layer 1 w10: v1(3677,3088) 3701,3088 3717,3104 3717,3172 3785,3240 v1(4003,3240) ; v1(4232,3449) 4288,3505 4505,3505 v1(4511,3511)
  Layer 4 w10: 4241,3439 4241,3471
  Bottom Layer w10: v1(3677,3088) 3681.02,3083.98 J2.17@3740,3083.98
DCMI_D2: J2.18 U1.117 | length 1312.1
  Top Layer w10: v1(4374.5,3618.58) v1@4374.5,3609.4 ; 4384,3646 4384,3618.9 v1@4374.5,3609.4 ; U1.117@4459.09,3528.74 4411.69,3528.74 4374.5,3565.93 v1@4374.5,3609.4
  Layer 4 w10: v1(3805,3319) v1@3805,3327.66 ; 3863.72,3373.5 3850.84,3373.5 ; v1(4374.5,3618.58) 4341.92,3586 ; v1@4384,3614 4356,3586 4341.92,3586 ; v1@3805,3327.66 3850.84,3373.5 ; v1@3805,3327.66 3805,3335 3843.5,3373.5 3850.84,3373.5 ; 3850.84,3373.5 4063.34,3586 4076.22,3586 4341.92,3586
  Bottom Layer w10: J2.18@3740,3115.47 3794.97,3115.47 3815.5,3136 3815.5,3184 3831.5,3200 3831.5,3239.5 3813,3258 3813,3311 v1(3805,3319)
DCMI_D3: J2.19 U1.118 | length 868.1
  Top Layer w10: 4421.57,3548.43 4424,3548.43 U1.118@4459.09,3548.43
  Layer 2 w10: 3808,3165 3816,3157 3816,3136 3832,3120 3871.63,3120 3920.39,3168.76 3920.39,3207.89 3954.5,3242 3954.5,3379.5 4039.5,3464.5 4153.5,3464.5 4258.5,3569.5
  Bottom Layer w10: v1(3688,3165) 3706.03,3146.97 J2.19@3740,3146.97
  other v1: 4404,3586
DCMI_D4: J1.39 U1.140 | length 746.6
  Top Layer w10: v1(4239.98,3818.98) 4239.98,3847.02 ; U1.140@4239.98,3905.33 4239.98,3847.02 ; 4244,3843 4239.98,3847.02
  Layer 4 w10: v1(4201,3716) 4246,3671 ; 4393,3671 4480.52,3583.48 ; 4480.52,3560 4495.52,3545 4556,3545 4573.5,3527.5 4573.5,3479.29 4615.95,3436.85 ; 4780,3235 v1(4831,3235)
  Bottom Layer w10: v1(4201,3716) 4201,3780 v1(4239.98,3818.98) ; v1(4831,3235) 4839.03,3243.03 J1.39@4910,3243.03
DCMI_D5: J1.36 U1.145 | length 2580.2
  Top Layer w10: U1.145@4141.56,3905.33 4141.56,3950.56 4162,3971 ; v1(4167,4191) 4167,4170 ; 4172,4175 4167,4170 ; 4162,3971 4167,3976 4167,4170 ; 4162,3971 4162,4165 4167,4170
  Layer 1 w10: v1(4167,4191) 4276,4191 4534.5,3932.5 4546,3932.5 4623.5,3855 4742.5,3855 4751.5,3846 4751.5,3808 4737,3793.5 4516.5,3793.5 4489,3766 4489,3696 4508,3677 4560,3677 4572,3665 4572,3633 v1(4596,3609)
  Layer 4 w10: 4172,4175 4172,4134.36 4306.67,3999.69 4306.67,3941.33
  Bottom Layer w10: v1(4596,3609) 4678,3609 4752,3535 4816,3535 4830,3521 4830,3416 4864,3382 4864,3345.52 4872,3337.52 J1.36@4910,3337.52
DCMI_D6: J1.26 U1.167 | length 1765.6
  Top Layer w10: 3692.09,3959.28 3708.48,3942.89 U1.167@3708.48,3905.33 ; 3744,4031.5 3769.5,4031.5 3784.5,4046.5 v1(3801.5,4046.5)
  Layer 1 w10: v1(3801.5,4046.5) 3858.5,4103.5 4087.5,4103.5 4088,4103 4088,3906 4063,3881 4063,3795 4102.5,3755.5 4286.5,3755.5 4295.5,3746.5 4359.48,3746.5 4448.47,3657.51 4543.99,3657.51 4552.15,3649.35 4552.15,3598.73 4737.88,3413 v1(4791,3413)
  Bottom Layer w10: J1.26@4724.96,3369.02 4768,3369.02 4791,3392.02 v1(4791,3413)
DCMI_D7: J1.27 U1.168 | length 1783.4
  Top Layer w10: v1(3658,4027) 3688.8,3996.2 ; 3673,3955.74 3688.8,3939.94 U1.168@3688.8,3905.33
  Layer 4 w10: v1(3658,4027) 3682.17,4002.83 3682.17,3986.83 3771,3898 ; 3755,3898 3771,3898 ; 4203,3610 4165,3648 4165,3708.5 ; v1(4308,3626) 4247.5,3626 4165,3708.5 ; 3771,3898 4082,3898 4155.5,3824.5 ; 4155.5,3824.5 4165,3815 4165,3708.5 ; 4155.5,3824.5 4155.5,3718 4165,3708.5
  Bottom Layer w10: v1(4308,3626) 4324,3610 4340,3610 4516.28,3433.72 4606.07,3433.72 4615.8,3395.7 4636,3375.5 4660.99,3375.5 4686,3400.51 J1.27@4724.96,3400.51
DCMI_HREF: J2.3 U1.85 | length 1200.6
  Top Layer w10: v1(4302.72,2947.3) 4318.72,2931.3 ; U1.85@4318.72,2896.24 4318.72,2931.3 ; 4318.72,2947 4318.72,2931.3
  Layer 2 w10: v1(3826.59,2691) 3826.59,2834.59 4061.5,3069.5 4176.5,3069.5 v1(4189,3057)
  Layer 3 w10: v1(4189,3057) 4189,3043.28 4284.98,2947.3 v1(4302.72,2947.3)
  Layer 4 w10: 3681,2680 3729,2680 ; v1(3689,2640) 3729,2680 ; v1(3826.59,2691) v1@3817,2691 ; 3729,2680 3806,2680 v1@3817,2691 ; 3729,2680 3740,2691 v1@3817,2691
  Bottom Layer w10: v1(3689,2640) 3692.03,2643.03 J2.3@3740,2643.03
DCMI_PLCK: J1.47 U1.52 | length 2178.5
  Top Layer w10: 3664,2841.89 3669.11,2847 ; 3667.5,2836.76 3669.11,2838.37 3669.11,2847 ; U1.52@3669.11,2896.24 3669.11,2847 ; 3716,2802.5 3717,2801.5
  Layer 4 w10: 3606,2595 v1(3606,2665) ; 3762,2439 3987,2439 4012,2464 4022,2464 4054,2432 v1(4054,2371)
  Bottom Layer w10: v1(4054,2371) 4089,2336 4864,2336 5035,2507 5035,2970 5013.94,2991.06 J1.47@4910,2991.06
DCMI_RESET: J1.25 J1.41 U1.138 U1.165 | length 2391.5
  Top Layer w10: U1.165@3747.85,3905.33 3747.85,3961.15 3747.85,3970.85 v1(3760,3983) ; v1(4279,3854) 4279.35,3854.35 U1.138@4279.35,3905.33 4279.35,3963.65
  Layer 4 w10: 3744,3965 3760,3949 ; v1(3760,3983) 3760,3949 ; 4199.41,3762.59 4186,3776 4186,3897 4159,3924 ; 4215,3924 4209,3924 ; v1(4279,3854) 4209,3924 ; 4280,3742 4345.45,3742 4477.7,3609.75 4525.25,3609.75 4535,3600 4535,3590.64 ; 4496,3637 4496,3618 4504,3610 ; 4631.64,3504 4631.64,3486.36 4678,3440 ; 4678,3481 4678,3440 ; v1(4777,3341) 4678,3440 ; 3760,3949 3776,3933 ; 3760,3949 3760,3939 3766,3933 3776,3933 ; 3776,3933 4200,3933 4209,3924 ; 3776,3933 3785,3924 4159,3924 ; 4159,3924 4209,3924
  Bottom Layer w10: J1.25@4724.96,3337.52 v1@4768,3337.52 ; v1(4777,3341) 4773.52,3337.52 v1@4768,3337.52 ; J1.41@4910,3180.04 4867,3180.04 4867,3197.98 4853.48,3211.5 4816,3211.5 4807.5,3220 4807.5,3298.02 v1@4768,3337.52
DCMI_SCL: J1.22 U1.162 | length 1689.1
  Top Layer w10: v1(3787,3963) 3787.91,3963 3806.91,3944 ; v1@3792,3969 3806.91,3954.09 3806.91,3944 ; U1.162@3806.91,3905.33 3806.91,3944
  Layer 4 w10: v1(3787,3963) 3844,3963 3878,3997 ; 4080,3965 4288,3965 ; 4416,3837 4462,3837 4752,3547 ; v1(4778,3285) 4788,3275 4845.09,3275 5026.59,3093.5 5227.5,3093.5 5248,3073 5273,3098 5273,3238
  Bottom Layer w10: J1.22@4724.96,3243.03 4768,3243.03 4778,3253.03 v1(4778,3285)
DCMI_SDA: J1.21 U1.161 | length 1799.5
  Top Layer w10: v1(3811,3987) 3826.59,3971.41 U1.161@3826.59,3905.33 3826.59,3857.41 3828,3856
  Layer 3 w10: v1(3811,3987) 3811,3957 4214.5,3553.5 4363,3553.5 4484.93,3431.57 4672.43,3431.57 4748,3356 4748,3279 4851,3176 v1(4851,3137)
  Bottom Layer w10: J1.21@4724.96,3211.54 4778.52,3211.54 4805.55,3184.5 4849.41,3184.5 4851,3182.91 v1(4851,3137)
DCMI_XCLK: J2.20 U1.119 | length 994
  Layer 1 w10: v1(3792,3147) 3834,3105 3854.16,3105 3938.16,3189 4070.64,3189 4123,3241.36 4123,3380 v1(4115,3388)
  Layer 2 w10: v1(4115,3388) 4281,3554 4400,3554 4408,3562
  Bottom Layer w10: J2.20@3740,3178.46 3776,3178.46 3785,3169.46 3785,3154 v1(3792,3147)
ETH_MDC: J1.9 U1.33 | length 2821.5
  Top Layer w10: 3398,3111 3398,3184.09 3408,3194.09 3416,3194.09 ; v1(3399,3170) 3399,3177.09 3416,3194.09 ; U1.33@3450,3194.09 3416,3194.09
  Layer 4 w10: 3343,3252 3360,3269 3432,3269 3438.5,3275.5 ; 3398,3111 v1@3398,3166 ; v1(3399,3170) 3424.5,3170 3438.5,3184 3438.5,3275.5 ; 3569.37,3282.5 3520.37,3331.5 ; 3722,3282.5 3768.5,3236 ; 3829,3167.5 3865.25,3167.5 3878.25,3154.5 ; 4067.18,3187.48 4093.72,3187.48 ; 4311,3187.48 4301.69,3187.48 ; v1(4812,2985) 4706.76,2985 4689.07,3002.69 4666.44,3002.69 4550.35,3118.78 4425.78,3118.78 4384.5,3077.5 4355,3077.5 4344.5,3088 4344.5,3144.67 4301.69,3187.48 ; 3438.5,3275.5 3494.5,3331.5 ; 3438.5,3275.5 3438.5,3296 3474,3331.5 3494.5,3331.5 ; 3494.5,3331.5 3520.37,3331.5 ; 3520.37,3331.5 3527.87,3331.5 3565.37,3294 3664.63,3294 3788.13,3170.5 4076.75,3170.5 4093.72,3187.48 ; 4093.72,3187.48 4099.75,3193.5 4295.67,3193.5 4301.69,3187.48 ; 4093.72,3187.48 4301.69,3187.48
  Bottom Layer w10: J1.9@4724.96,2833.58 4768,2833.58 4780,2845.58 4780,2916 4812,2948 v1(4812,2985)
ETH_MDIO: J1.4 U1.42 | length 2166.8
  Top Layer w10: 3372.07,3016.93 U1.42@3450,3016.93
  Layer 3 w10: 3372.07,3016.93 3372.07,2953.43 3531.89,2793.61 3531.89,2768 3505.39,2741.5 3406,2741.5 3384.5,2720 3384.5,2627 3514.5,2497 3729.5,2497 3793,2560.5 3994.5,2560.5 4000.5,2554.5 4041.5,2554.5 4081.5,2594.5 4519,2594.5 4540,2573.5 4624,2573.5 v1(4672,2621.5)
  Bottom Layer w10: v1(4672,2621.5) 4672,2660.1 4688,2676.1 J1.4@4724.96,2676.1
FMC_A0: U1.16 U3.23 | length 1915.6
  Top Layer w10: U1.16@3450,3528.74 3493,3528.74 ; v1(3579,3552) 3539,3512 3510.74,3512 3494,3528.74 3493,3528.74 ; v1@3579,3563 3512,3563 3503,3554 3503,3538.74 3493,3528.74 ; v1@4659,2951 v1(4665.49,2944.51) 4729.05,2880.95 U3.23@4729.05,2785
  Layer 3 w10: v1(3579,3552) 3681.9,3552 3745.9,3488 3829,3488 3877,3440 4069.05,3440 4092,3417.05 4209.95,3417.05 4250.5,3376.5 4250.5,3316.93 4282.5,3284.94 4471.75,3284.94 4649.49,3107.19 4649.49,2960.51 v1(4665.49,2944.51)
FMC_A1: U1.17 U3.24 | length 2501.3
  Top Layer w10: 3174,3238.56 3174,3256.59 ; 3174,3506.5 3174,3506 ; 3258.52,3082.48 3258.52,3120.55 3181.59,3197.47 3181.59,3249 3174,3256.59 ; 3329.5,2895.78 3329.5,2980.5 ; 3377.57,3506.5 3380.13,3509.06 ; 3396.39,2828.89 3396.39,2816 3406.89,2805.5 3466.5,2805.5 ; 3411.23,2804.23 3400.5,2793.5 3400.5,2752 3413.27,2739.23 3542.23,2739.23 v1(3581,2778) ; U1.17@3450,3509.06 3380.13,3509.06 ; 3577.47,2694.53 3577.47,2682.61 3589.39,2682.61 ; 4664,2693.75 4664,2698 4697.56,2731.56 ; 4664.56,2687 4697.56,2720 4697.56,2731.56 ; U3.24@4697.56,2785 4697.56,2731.56 ; 3174,3256.59 3174,3506 ; 3174,3506 3275,3506 3287,3494 3324.37,3494 3339.43,3509.06 3380.13,3509.06
  Layer 3 w10: v1(3581,2778) 3581,2740.36 3611.59,2709.77 3657.23,2709.77 3724.5,2642.5 4527.5,2642.5 4572,2687 v1(4600,2687)
FMC_A2: U1.18 U3.25 | length 2602.8
  Top Layer w10: 3353.5,3171.5 3326.54,3198.46 3326.54,3223.5 3324.5,3225.54 3324.5,3245.5 ; v1(3358,3212) 3324.5,3245.5 ; U1.18@3450,3489.37 3392.44,3489.37 ; v1(4531,2769) 4531,2801 ; 4605,2838 4621,2854 4621,2871 4630,2880 4657,2880 4673,2864 4673,2835.94 4666.06,2829 ; U3.25@4666.06,2785 4666.06,2829 ; 4666.06,2840.94 4666.06,2829 ; 3324.5,3245.5 3324.5,3450.19 3360,3485.69 3388.76,3485.69 3392.44,3489.37 ; 3324.5,3245.5 3324,3246 3324,3458.37 3355,3489.37 3392.44,3489.37
  Layer 1 w10: v1(4154,2978) 4178,3002 4326.24,3002 4531,2797.24 v1(4531,2769)
  Layer 3 w10: v1(3358,3212) 3358,3175 3424.5,3108.5 3597.5,3108.5 3687,3198 3700,3198 3742,3240 3882,3240 3952,3170 3952,3038 4000,2990 4142,2990 v1(4154,2978)
FMC_A3: U1.19 U3.26 | length 2460.1
  Top Layer w10: 3340.5,3257.5 3340.5,3415.5 3352.17,3427.17 ; v1(3376,3242) 3352.17,3265.83 3352.17,3427.17 ; U1.19@3450,3469.69 3394.69,3469.69 ; 4493,2899 4553,2839 ; U3.26@4634.57,2785 4634.57,2827.72 ; 4634.57,2828.43 4634.57,2827.72 ; v1(4645,2856) 4634.57,2827.72 ; 3352.17,3427.17 3394.69,3469.69 ; 3352.17,3427.17 3352.17,3448.85 3373,3469.69 3394.69,3469.69
  Layer 3 w10: v1(3376,3242) 3434,3242 3451,3225 3565,3225 3605.5,3250.5 3641.5,3214.5 3683.97,3214.5 3725.47,3256 3913.14,3256 3971.14,3198 4220.37,3198 4250.5,3167.87 4250.5,3083.78 4228.5,3061.78 4228.5,3035.78 4263.78,3000.5 4395.5,3000.5 4509,2887 4603.5,2887 4634.5,2856 v1(4645,2856)
  Layer 4 w10: 3864.68,3018 3973.68,2909
FMC_A4: U1.20 U3.29 | length 3332.2
  Top Layer w10: U1.20@3450,3450 3506,3450 ; 3541,3450 3506,3450 ; 3826,3380.5 3826,3361 v1(3853,3334) 3853,3369.44 3799.5,3422.94 3739.06,3422.94 3663.5,3498.5 3554.5,3498.5 3506,3450 ; v1(4584,2422) 4634.57,2371.43 4634.57,2353.43 ; 4600,2380 4608,2380 4634.57,2353.43 ; U3.29@4634.57,2312.56 4634.57,2353.43
  Layer 1 w10: v1(3385,2852) 3522.13,2714.87 3522.13,2688 3678.63,2531.5 3758,2531.5 3787,2560.5 3853,2560.5 3950.5,2463 4091,2463 4398,2156 4521,2156 4584,2219 v1(4584,2422)
  Layer 2 w10: v1(3385,2852) 3434,2901 3434,3105 3639.5,3310.5 3702.5,3310.5 3735.94,3343.94 3843.06,3343.94 v1(3853,3334)
FMC_A5: U1.21 U3.30 | length 2447.2
  Top Layer w10: U1.21@3450,3430.32 3523.32,3430.32 3576,3430.32 3596.68,3451 ; 3575.5,3482.5 3641,3482.5 3651.5,3472 ; 3651.5,3349.59 3758.34,3242.76 3862.24,3242.76 3867.5,3237.5 ; 3849.5,3237.5 3867.5,3237.5 ; 3979,3113 3896.5,3195.5 3896.5,3208.5 ; v1(3979,3126) 3896.5,3208.5 ; 4448,2408.92 4448,2310 ; 4448,2454 v1@4464,2470 ; 4464,2424.92 v1@4464,2470 ; v1(4464,2479) v1@4464,2470 ; 4496,2262 4448,2310 ; 4510,2516 v1@4464,2470 ; U3.30@4666.06,2312.56 4666.06,2272 4656.06,2262 4653.56,2259.5 4492.5,2259.5 4448,2304 4448,2310 ; 3867.5,3237.5 3875,3237.5 3896.5,3216 3896.5,3208.5 ; 3867.5,3237.5 3896.5,3208.5
  Layer 1 w10: v1(3979,3126) 3994.71,3141.71 4088,3141.71 4100,3129.71 4100,3053.5 4089,3042.5 4089,2924 4121.5,2891.5 4221.5,2891.5 4254.5,2858.5 4254.5,2819.5 4301,2773 4301,2739.15 4464,2576.15 v1(4464,2479)
FMC_A6: U1.60 U3.31 | length 1531.8
  Top Layer w10: U1.60@3826.59,2896.24 3826.59,2760.39 ; 3913.09,2665.5 3826.59,2752 3826.59,2760.39 ; 4530.52,2541.81 4465.01,2541.81 4359.31,2647.5 3939.48,2647.5 3826.59,2760.39 ; 4539.16,2446 4626.32,2446 ; 4540.59,2490.76 4560,2471.35 4600.97,2471.35 4626.32,2446 ; U3.31@4697.56,2312.56 4697.56,2374.76 ; 4626.32,2446 4653.08,2446 4697.56,2401.52 4697.56,2374.76 ; 4626.32,2446 4697.56,2374.76
FMC_A7: U1.63 U3.32 | length 1646.3
  Top Layer w10: v1(3852,2815) 3885.65,2848.65 U1.63@3885.65,2896.24 ; 4379.11,2663.5 4484.81,2557.81 ; v1(4432,2428) 4432,2292 4480.5,2243.5 4703.5,2243.5 4729.05,2269.05 U3.32@4729.05,2312.56 4729.05,2367.27
  Layer 1 w10: v1(3852,2815) 3861,2824 3917,2824 3954.5,2786.5 4063.47,2786.5 4075.97,2799 4149.72,2799 4182.87,2808 4198,2792.87 4198,2684 4271,2611 4271,2589 v1(4432,2428)
FMC_A8: U1.64 U3.33 | length 939.2
  Top Layer w10: U1.64@3905.33,2896.24 3905.33,2848 3905.33,2784.19 3936.53,2753 4037.01,2753 4103.71,2686.3 4261.5,2686.3 4266.3,2681.5 4340.4,2681.5 ; 3944.8,2781.7 3968,2758.5 4075.27,2758.5 ; 4386.48,2679.5 4388.88,2677.1 ; 4649.21,2472.5 4760.55,2361.16 U3.33@4760.55,2312.56
FMC_A9: U1.65 U3.34 | length 983.8
  Top Layer w10: 3925.02,2793.31 U1.65@3925.02,2896.24 3925.02,2976 3958.52,3009.5 4003.05,3009.5 4037.48,3043.93 ; 4067.93,3043.93 4100,3076 ; 4277.5,2702.3 4282.3,2697.5 4356.4,2697.5 ; 4370,2310 4434,2246 ; 4535.1,2518.8 4557.2,2518.8 4587.51,2488.5 4658.5,2488.5 4792.05,2354.95 U3.34@4792.05,2312.56 4792.05,2270.05 4768,2246
FMC_A10: U1.66 U3.22 | length 1088.8
  Top Layer w10: U1.66@3944.7,2896.24 3944.7,2944 ; 3944.7,2956.7 3944.7,2944 ; 3982.19,2981.48 3944.7,2944 ; 4113,3053.5 v1(4187.5,3128) ; 4204,3125.5 4204,3127 ; U3.22@4760.55,2785 4760.55,2836.05 ; 4760.55,2839 4760.55,2836.05 ; v1(4804,2879.5) 4760.55,2836.05
  Layer 1 w10: v1(4187.5,3128) 4228.22,3087.28 4313.72,3087.28 4562,2839 4591.5,2839 4632,2879.5 v1(4804,2879.5)
FMC_A11: U1.67 U3.35 | length 1160.4
  Top Layer w10: U1.67@3964.39,2896.24 3964.39,2814.11 ; 4088.98,2774.5 4083.13,2774.5 ; 4136.72,2726.76 4234.24,2726.76 4242.7,2718.3 ; 4251.5,2709.5 4242.7,2718.3 ; 4372.4,2713.5 4298.3,2713.5 4293.5,2718.3 4242.7,2718.3 ; 4400,2709.5 4414,2695.5 ; 4551.1,2534.8 4569.7,2534.8 4600,2504.5 ; 4690.04,2504.5 4823.54,2371 4823.54,2352 ; 4807,2368.55 4823.54,2352 ; U3.35@4823.54,2312.56 4823.54,2352 ; 3964.39,2814.11 3964.39,2790.61 3980.5,2774.5 4083.13,2774.5 ; 3964.39,2814.11 3992,2786.5 4071.13,2786.5 4083.13,2774.5 ; 4083.13,2774.5 4139.33,2718.3 4242.7,2718.3
FMC_A12: U1.106 U3.36 | length 1983.2
  Top Layer w10: 4370,3272.46 4385,3272.46 ; 4408.58,3312.21 4424.75,3312.21 U1.106@4459.09,3312.21 ; U3.36@4855.04,2312.56 4855.04,2376.04 ; 4880.5,2401.5 4855.04,2376.04 ; v1(4881,2421) 4855.04,2395.04 4855.04,2376.04
  Layer 2 w10: v1(4858,3075) 4898,3035 4898,2438 v1(4881,2421)
  Layer 4 w10: 4434,2847 4528,2847 4600,2775 4843,2775 4880.5,2737.5 4880.5,2401.5 ; 4642,3174 4741,3075 v1(4858,3075)
  other v1: 4335,3261
FMC_A16_CLE: J2.23 U1.99 U4.16 | length 2382.9
  Top Layer w10: U1.99@4459.09,3174.41 4532.41,3174.41 ; U4.16@4667.6,3583.74 4720,3583.74 ; 4750,3515 4752,3513 ; 4750,3553.74 4720,3583.74 ; v1(4805,3460) 4752,3513 ; 4532.41,3174.41 4586,3174.41 4640,3228.41 v1(4640,3282) 4532.41,3174.41 ; 4720,3583.74 4736,3583.74 4752,3567.74 4752,3513
  Layer 1 w10: v1(4640,3282) 4746,3388 4802.5,3388 4814.5,3400 4814.5,3450.5 v1(4805,3460)
  Layer 4 w10: 3792,3216 v1(3808,3216) 3824,3216 3854,3246 ; 3892.38,3300.38 4058.08,3300.38 4063,3305.3 4063,3526.5 4071.5,3535 4151,3535 4180.82,3505.18 4416.82,3505.18 4576,3346 v1(4640,3282) ; 4137.5,3246 4155.5,3264 4155.5,3376 4172,3392.5
  Bottom Layer w10: J2.23@3740,3272.95 3776,3272.95 3792,3256.95 3792,3232 v1(3808,3216)
FMC_A17_ALE: J2.21 U1.100 U4.17 | length 2769.2
  Top Layer w10: U1.100@4459.09,3194.09 4495.09,3194.09 ; 4551,3242.09 4503,3194.09 4495.09,3194.09 ; 4572,3644 4572,3628 ; v1(4604,3660) 4572,3628 ; U4.17@4667.6,3564.05 4595.05,3564.05 ; v1(4856,3302) 4849.5,3308.5 4609.5,3308.5 4495.09,3194.09 ; 4572,3628 4572,3576 4583.95,3564.05 ; 4583.95,3564.05 4595.05,3564.05 ; 4583.95,3564.05 4589.5,3558.5 4595.05,3564.05
  Layer 1 w10: v1(4604,3660) 4704,3560 4704,3501 4720,3485 4832,3485 4856,3461 v1(4856,3302)
  Layer 2 w10: v1(3681,3041) 3742.2,3102.2 3887.2,3102.2 3968.61,3183.61 4024.87,3183.61 4176.72,3335.46 4227.57,3335.46 4282,3389.89 4282,3468 4320,3506 4442,3506 4482,3546 4521,3546 4535,3560 4535,3591 v1(4604,3660)
  Bottom Layer w10: v1(3681,3041) 3650.55,3071.45 3650.55,3166.51 3694,3209.96 J2.21@3740,3209.96
FMC_A18: J2.14 U1.101 | length 972.5
  Top Layer w10: 4414.78,3213.78 U1.101@4459.09,3213.78
  Layer 1 w10: v1(3689,2989.49) 3947.78,2989.49 v1(4076.5,3118.21)
  Bottom Layer w10: v1(3689,2989.49) J2.14@3740,2989.49 ; v1(4076.5,3118.21) 4102.21,3092.5 4313.63,3092.5 4321.07,3168 4366.85,3213.78 4414.78,3213.78
FMC_BA0: U1.108 U3.20 | length 1319.5
  Top Layer w10: U1.108@4459.09,3351.58 4494.58,3351.58 ; 4507.7,3402.7 4507.7,3364.7 4494.58,3351.58 ; v1(4555,3405) 4556.34,3405 4563.67,3397.67 4517.58,3351.58 4494.58,3351.58 ; 4760,2913.5 4733,2940.5 ; v1(4787,3146) 4770.5,3129.5 ; 4813.5,2913.5 4831,2896 4831,2796 U3.20@4823.54,2796 ; U3.20@4823.54,2785 U3.20@4823.54,2796 ; 4824.75,3117.25 4812.5,3129.5 4770.5,3129.5 ; 4828,2825.46 4823.54,2821 U3.20@4823.54,2796 ; 4828,2892 4807.25,2912.75 4752.75,2912.75 4733,2932.5 4733,2940.5 ; 4733,2940.5 4733,3080 ; 4733,3080 4733,3092 4750.5,3109.5 ; 4733,3080 4750.5,3097.5 4750.5,3109.5 ; 4750.5,3109.5 4770.5,3129.5 ; 4750.5,3109.5 4750.5,3113.5 4766.5,3129.5 4770.5,3129.5
  Layer 1 w10: v1(4555,3405) 4555,3244.3 4658.3,3141 4787,3141 v1(4787,3146)
FMC_BA1: U1.109 U3.21 | length 1516.6
  Top Layer w10: 4320,3284.94 4311.5,3276.44 4311.5,3247 4342.5,3216 ; 4342.5,3015.63 4358,3000.13 ; 4346.3,3288 4354.3,3296 ; 4400.54,3357.49 4414.31,3371.26 4424,3371.26 ; 4415,3345.89 4415,3362.26 4424,3371.26 ; U1.109@4459.09,3371.26 4424,3371.26 ; 4483,2875.13 4358,3000.13 ; 4646,2558 4662,2558 ; U3.21@4792.05,2785 4792.05,2744 4807,2729.05 4807,2568 4797,2558 4796.5,2558 ; 4806.5,2704.67 4806.5,2568 4796.5,2558 ; 4358,3000.13 4507.5,2850.63 4507.5,2758 4560.5,2705 4560.5,2640 4575.5,2625 4611,2625 4644,2592 4644,2576 4662,2558 ; 4662,2558 4796.5,2558
FMC_D0: J2.45 U1.104 U3.2 U4.29 | length 3603.8
  Top Layer w10: v1(4382,3170) 4382,3238.83 4416,3272.83 ; v1@4387,3177 4401,3163 4401,3147 ; 4387,3246 4413.83,3272.83 4416,3272.83 ; U1.104@4459.09,3272.83 4416,3272.83 ; v1(5333,3427) 5482,3278 ; U3.2@5390.47,2785 5390.47,2855 ; 5434,2944.53 5390.47,2901 5390.47,2855 ; U4.29@5455,3505 5413,3505 5404,3496 5404,3416 5415,3405 ; 5390.47,2855 5482,2946.53 5482,3278 ; 5415,3405 5482,3338 ; 5415,3405 5472,3405 5482,3395 5482,3338 ; 5482,3278 5482,3338
  Layer 3 w10: v1(4382,3170) 4536,3170 4633.49,3072.51 4633.49,2920 4641.99,2911.5 4682.5,2911.5 4706,2935 4863.39,2935 5035.5,3107.11 5035.5,3168.5 5004,3200 5004,3312 5119,3427 v1(5333,3427)
  Bottom Layer w10: J2.45@3925.04,3052.48 4089.5,3052.48 4090.52,3053.5 4144.5,3053.5 4187.5,3010.5 4254.5,3010.5 4344,3100 4344,3132 v1(4382,3170)
FMC_D1: J2.46 U1.105 U3.4 U4.30 | length 3934.7
  Top Layer w10: 4358.5,3110.5 v1(4368,3101) ; 4411.52,3292.52 U1.105@4459.09,3292.52 4519.52,3292.52 4559,3332 ; v1(5320,2964) v1@5327.48,2956.52 ; v1@5327.48,2964 v1@5327.48,2956.52 ; U4.30@5455,3524.68 5498.32,3524.68 5509,3514 5509,2723 5494,2708 5344,2708 5327.48,2724.52 U3.4@5327.48,2785 v1@5327.48,2956.52
  Layer 2 w10: v1(4050,3020.98) 4082.52,3053.5 4123,3053.5 4159,3017.5 4202.5,3017.5 4212,3008 4212,2949 4224,2937 4248,2937 4368,3057 v1(4368,3101)
  Layer 4 w10: v1(4050,3020.98) 4050,3023.5 4096,3069.5 4140,3069.5 4176,3033.5 4231.5,3033.5 4240.72,3024.28 4357.74,3024.28 4365.52,3016.5 4414.5,3016.5 4431,3000 4480.39,3000 ; 4464.89,3015.5 4480.39,3000 ; 4738.25,2944.75 4855.75,2944.75 ; 4794.72,3189.78 4855.71,3189.78 4898,3147.49 4898,3008 4911.5,2994.5 ; 4942,2964 4911.5,2994.5 ; v1(5320,2964) 5082.47,2964 5051.97,2994.5 4911.5,2994.5 ; 4480.39,3000 4615.81,3000 4629.13,2986.69 4682.44,2986.69 4709.13,2960 4821.5,2960 4837.5,2976 4837.5,2984 4848,2994.5 4911.5,2994.5
  Bottom Layer w10: J2.46@3925.04,3020.98 v1(4050,3020.98)
FMC_D2: J2.47 U1.142 U3.5 U4.31 | length 6049.1
  Top Layer w10: U1.142@4200.61,3905.33 4200.61,4110.61 ; 5191.5,3660.27 5307.4,3544.37 5340.37,3544.37 ; 5191.5,4144 5174.5,4161 4910.65,4161 4897.15,4174.5 4833.5,4174.5 4820,4161 v1(4492,4161) 4251,4161 ; U3.5@5295.98,2785 5295.98,2702.2 5321.19,2677 ; v1(5322,3526) 5340.37,3544.37 ; 4200.61,4110.61 4200.61,4123 4238.61,4161 4251,4161 ; 4200.61,4110.61 4251,4161 ; 5321.19,2677 5337.19,2661 5476,2661 5492,2677 ; 5321.19,2677 5492,2677 ; 5340.37,3544.37 U4.31@5455,3544.37 5510.63,3544.37 5535,3520 5535,2720 5492,2677
  Layer 2 w10: v1(3849,3144) 3873,3144 3904.39,3175.39 3904.39,3363.87 4126.02,3585.5 4319.5,3585.5 4332.5,3598.5 4332.5,3656 4400.5,3724 4576,3724 4612,3760 4612,4041 v1(4492,4161)
  Layer 4 w10: v1(4492,4161) 4859,3794 4859,3605 4896,3568 5086,3568 5209.5,3444.5 5240.5,3444.5
  Bottom Layer w10: v1(3849,3144) 3849,3128 3878,3099 3878,2999.49 J2.47@3925.04,2989.49
FMC_D3: J2.48 U1.143 U3.7 U4.32 | length 5426
  Top Layer w10: U1.143@4180.93,3905.33 4180.93,3842.07 ; 4225,3792 4199,3792 4180.93,3810.07 4180.93,3842.07 ; v1(4244,3779) 4180.93,3842.07 ; 5232.99,2713.01 5232.99,2725 ; U3.7@5232.99,2785 5232.99,2734 ; 5306.99,2660 5232.99,2734 ; 5322,3564.05 U4.32@5455,3564.05 5522.95,3564.05 5530.32,3556.68 ; 5504,2660 5551,2707 ; 5232.99,2725 5232.99,2734 ; 5232.99,2725 5320.99,2637 v1(5345,2637) 5528,2637 ; 5528,2637 5532,2637 5551,2656 5551,2660 ; 5528,2637 5551,2660 ; 5530.32,3556.68 5551,3536 ; 5530.32,3556.68 5538.34,3556.68 5551,3544.02 5551,3536 ; 5551,2660 5551,2707 ; 5551,2707 5551,3536
  Layer 3 w10: v1(4244,3779) 4225.5,3760.5 4225.5,3688.88 4236.88,3677.5 4441.5,3677.5 4554.82,3564.18 4753.82,3564.18 4767.5,3550.5 4870.5,3550.5 4920.95,3500.05 v1(5258,3500.05)
  Layer 4 w10: 4198.5,3001.5 4211.48,2988.52 ; 4242,2991 4262,2971 4320,2971 ; 4302.48,2988.52 4320,2971 ; 4620.5,3388 4632,3376.5 4656.5,3376.5 ; 4653.75,2912 4637.75,2928 4637.75,2939.75 4595.5,2982 ; 4713.5,2933 4675.81,2970.69 4613.13,2970.69 4601.81,2982 4595.5,2982 ; 4896,2912 4927,2943 ; 4898,3259 4936,3221 ; 5011.41,2970.59 5305,2677 ; 5270,2907 5305,2872 5305,2677 ; 5338,2997 5351,2984 ; v1(5345,2637) 5323,2659 ; 5351,2687 5323,2659 ; 4320,2971 4341,2971 4351,2961 4465,2961 4488,2984 4593.5,2984 4595.5,2982 ; 4320,2971 4340.5,2950.5 4505.5,2950.5 4537,2982 4595.5,2982 ; 5305,2677 5305,2641 5323,2659 ; 5305,2677 5323,2659
  Bottom Layer w10: J2.48@3925.04,2957.99 3953,2957.99 3966.01,2971 4003.5,2971 4032,2942.5 4067.5,2942.5 4113,2988 v1(4113,3030)
FMC_D4: J2.49 U1.68 U3.8 U4.41 | length 4056.8
  Top Layer w10: v1(3982,2947) 3984.07,2944.93 U1.68@3984.07,2896.24 ; v1(5201.5,2720) U3.8@5201.5,2785 ; U4.41@5455,3741.22 5598,3741.22 ; 5598,3741.22 v1(5600,2720) 5600,3739.22 5598,3741.22
  Layer 1 w10: v1(5201.5,2720) v1(5600,2720)
  Layer 3 w10: v1(4150,2753) 4189.5,2713.5 4372.5,2713.5 4386,2727 4618.75,2727 4646.71,2754.96 5166.54,2754.96 v1(5201.5,2720)
  Layer 4 w10: v1(3982,2947) 3982,2928 4000,2910 4062,2910 ; 4107,2808 4119,2796 4138,2796 4150,2784 v1(4150,2753)
  Bottom Layer w10: J2.49@3925.04,2926.5 3961.5,2926.5 v1(3982,2947)
FMC_D5: J2.50 U1.69 U3.10 U4.42 | length 4039.7
  Top Layer w10: v1(4003,2810) 4003,2870.24 4003.76,2871 U1.69@4003.76,2896.24 ; 5138.5,2739.5 U3.10@5138.5,2785 5138.5,2851.01 ; v1(5139,2893) 5138.5,2892.5 5138.5,2851.5 ; 5164,2877 5138.5,2851.5 ; 5187,2691 5244,2691 5326,2609 5607,2609 5654,2656 5654,3872 5619,3907 5423,3907 5404,3888 5404,3760.9 5408.9,3760.9 ; 5361,3713 5408.9,3760.9 ; U4.42@5455,3760.9 5408.9,3760.9 ; 5138.5,2851.01 5138.5,2851.5 ; 5138.5,2851.01 5139,2851.5 5138.5,2851.5
  Layer 3 w10: v1(4003,2810) 4003,2864 4011,2872 4059,2872 ; v1(4059,2845) 4059,2872 ; v1(5139,2893) 5120,2893 5027.5,2800.5 4524,2800.5 4483,2759.5 4369.22,2759.5 4343.36,2785.36 4343.36,2814.64 4286,2872 4059,2872
  Bottom Layer w10: J2.50@3925.04,2895 4032,2895 4059,2868 v1(4059,2845)
FMC_D6: J2.51 U1.70 U3.11 U4.43 | length 4467.7
  Top Layer w10: 4023.44,2949.44 U1.70@4023.44,2896.24 4023.44,2851.56 v1(4027,2848) ; U3.11@5107.01,2785 5107.01,2705.99 v1(5125,2688) ; U4.43@5455,3780.59 5593.41,3780.59 5630,3744 5630,3341 v1(5630,2926) 5630,2894
  Layer 1 w10: v1(5125,2688) 5331,2894 5598,2894 v1(5630,2926)
  Layer 3 w10: v1(4255,3047.78) 4286.28,3016.5 4409.21,3016.5 4491.21,2934.5 4604.5,2934.5 4616.53,2922.47 4616.53,2900.5 4621.53,2895.5 4759.5,2895.5 4780.5,2916.5 4894.5,2916.5 5051.5,3073.5 5051.5,3184.5 5020,3216 5020,3280 5050.5,3310.5 5583.5,3310.5 5630,3264 v1(5630,2926)
  Layer 4 w10: 4023.44,2949.44 4023.44,3051.44 4057.5,3085.5 4217.28,3085.5 ; 4059.49,3059.93 4059.49,3073.99 ; 4255,3083.5 4271,3067.5 4287,3067.5
  Bottom Layer w10: J2.51@3925.04,2863.5 4011.5,2863.5 v1(4027,2848)
FMC_D7: J2.52 U1.73 U3.13 U4.44 | length 4481.2
  Top Layer w10: v1(4052.47,2813) 4063.5,2813 4082.5,2832 4082.5,2862.5 U1.73@4082.5,2896.24 ; 5029.01,2867 5044.01,2852 5044.01,2836 ; U3.13@5044.01,2785 5044.01,2836 ; 5261,2954 5282.77,2975.77 ; 5373,3040 5338,3005 5312,3005 ; U4.44@5455,3800.27 5505.63,3800.27 ; v1(5458,3151) 5312,3005 ; 5545,3830 5535.36,3830 v1(5521.36,3816) 5505.63,3800.27 ; 5552,3816 5551.73,3816 5536,3800.27 5505.63,3800.27 ; 5044.01,2836 4985,2895.01 4985,2952.77 5008,2975.77 5282.77,2975.77 ; 5282.77,2975.77 v1(5297,2990) 5312,3005
  Layer 3 w10: v1(3801,2776) 3677,2776 3664,2789 3664,2849 3680,2865 3900,2865 3978.5,2786.5 4051.5,2786.5 4112,2847 4153,2847 4265.7,2734.3 4304.7,2734.3 4309.5,2729.5 4343,2729.5 4356.5,2743 4545,2743 4575,2773 5332,2773 5383,2824 5383,2951 5344,2990 v1(5297,2990)
  Bottom Layer w10: v1(3801,2776) 3801,2799.74 3840,2838.74 3866.86,2838.74 3873.59,2832.01 J2.52@3925.04,2832.01 3964.49,2832.01 3974.87,2821.63 3974.87,2795.63 3984,2786.5 4025.97,2786.5 v1(4052.47,2813) ; v1(5458,3151) 5458,3752.64 v1(5521.36,3816)
FMC_D8: J2.53 U1.74 U3.42 | length 1150.1
  Top Layer w10: 4102.19,2802.31 4102.19,2851.81 ; U1.74@4102.19,2896.24 4102.19,2851.81 ; v1(4131,2823) 4102.19,2851.81 ; U3.42@5044.01,2312.56 5044.01,2368 5076.01,2400 v1(5133,2400)
  Layer 3 w10: v1(3876,2793) 3898.5,2770.5 4078.5,2770.5 v1(4131,2823)
  Layer 4 w10: v1(4131,2823) 4177,2869 ; 4345.89,2800 4345.89,2824.11 ; 4701.22,2745.5 4743.5,2703.22 4743.5,2562.5 4778,2528 ; 5005,2528 v1(5133,2400)
  Bottom Layer w10: v1(3876,2793) 3883.51,2800.51 J2.53@3925.04,2800.51
FMC_D9: J2.54 U1.75 U3.44 | length 2312.7
  Top Layer w10: v1(4117,2947) 4121.87,2942.13 v1@4121.87,2935.87 ; U1.75@4121.87,2896.24 v1@4121.87,2935.87 ; 4133,2947 v1@4121.87,2935.87 ; v1(5012,2128) 5107.01,2223.01 U3.44@5107.01,2312.56
  Layer 4 w10: 3994,2666 3994,2721 ; v1(4117,2947) 4158.62,2905.38 4472.62,2905.38 ; 4157.5,2502.5 4187.25,2502.5 4215.25,2474.5 ; 4658,2188 4777,2188 4837,2128 ; 4852.29,2790.5 4902.5,2740.29 4902.5,2645.69 4934,2614.19 4966.81,2614.19 5257,2324 5257,2190 ; v1(5012,2128) 5195,2128
  Bottom Layer w10: J2.54@3925.04,2769.02 3963.5,2769.02 3964.98,2770.5 4082.5,2770.5 4102.19,2790.19 4102.19,2932.19 v1(4117,2947)
FMC_D10: J2.55 U1.76 U3.45 | length 2348.6
  Top Layer w10: U1.76@4141.56,2896.24 4141.56,2846.5 4154.5,2833.56 4154.5,2806.06 ; v1(5129,2192) 5129,2263.5 ; 5129,2263.5 U3.45@5138.5,2312.56 5138.5,2273 5129,2263.5
  Layer 4 w10: 4089.73,2702.73 4090.27,2702.73 ; 4090,2703 4090.27,2702.73 ; 4247.5,2693.5 4217.5,2663.5 4129.5,2663.5 ; 4090.27,2702.73 4129.5,2663.5 ; 4129.5,2663.5 4152.01,2640.99 4514.44,2640.99 4810.53,2344.91 4849.08,2344.91 4881.09,2344.91 ; 4881.09,2344.91 4976.09,2344.91 v1(5129,2192) 5034,2192 4881.09,2344.91
  Bottom Layer w10: J2.55@3925.04,2737.52 3960.98,2737.52 ; 4089.73,2702.73 4061,2674 4008,2674 3994.5,2687.5 3994.5,2704 3960.98,2737.52 ; v1(4120,2771.56) 4102.94,2754.5 4000.98,2754.5 3984,2737.52 3960.98,2737.52
FMC_D11: J2.56 U1.77 U3.47 | length 2954
  Top Layer w10: U1.77@4161.24,2896.24 v1@4161.24,2935 ; 5185,2421 5201.5,2404.5 ; U3.47@5201.5,2312.56 5201.5,2404.5 ; v1(5201.5,2434.5) 5201.5,2404.5 ; v1@4161.24,2935 4161.24,2944.24 v1(4164,2947) 4164,2937.76 v1@4161.24,2935
  Layer 2 w10: v1(3822,2537) 3788,2571 3788,2632 3798,2642 3872,2642 4019,2789 4064,2789 4102.19,2827.19 4102.19,2885.19 v1(4164,2947)
  Layer 4 w10: v1(4164,2947) 4187.69,2923.31 ; 4597,2807 4568,2836 ; 4627,2791 4582,2836 4568,2836 ; 4899,2791 4934,2756 ; 4934,2769 4934,2756 ; 5185,2421 4974.26,2631.74 ; v1(5201.5,2434.5) 5004.25,2631.74 4974.26,2631.74 ; 4187.69,2923.31 4189.62,2921.38 4482.62,2921.38 4556,2848 ; 4187.69,2923.31 4512.69,2923.31 4556,2880 4556,2848 ; 4556,2848 4568,2836 ; 4934,2672 4934,2657.74 4960,2631.74 4974.26,2631.74 ; 4934,2672 4974.26,2631.74 ; 4934,2672 4934,2756
  Bottom Layer w10: v1(3822,2537) 3857.35,2572.35 3857.35,2672.35 3891.02,2706.02 J2.56@3925.04,2706.02
FMC_D12: J2.57 U1.78 U3.48 | length 2925.9
  Top Layer w10: U1.78@4180.93,2896.24 4180.8,2868.37 4180.8,2821.44 4196.8,2805.44 4244.85,2805.44 4276.5,2773.8 v1(4276.5,2757.8) ; 4208,2810 4270,2810 ; 5232.99,2185 v1(5232.99,2201) U3.48@5232.99,2312.56
  Layer 4 w10: 4175,2703 4178,2706 ; 4178,2703 4178,2706 ; 4196.25,2724.25 4178,2706 ; v1(4276.5,2757.8) 4310.05,2724.25 4628.76,2724.25 4713,2640.01 ; 5232.99,2185 5039.99,2378 ; v1(5232.99,2201) 5055.99,2378 5039.99,2378 ; 4178,2706 4178,2718 4270,2810 4270,2795 4288,2777 4450.62,2777 4498.62,2729 4672,2729 4713,2688 4713,2640.01 ; 4713,2640.01 4713,2522 4857,2378 5039.99,2378
  Bottom Layer w10: J2.57@3925.04,2674.53 3970,2674.53 3986.53,2658 4130,2658 4175,2703